# EAGLE board femto-beacon-esp32coin-PANEL (EAGLE 9.3.0), part 1 of 3
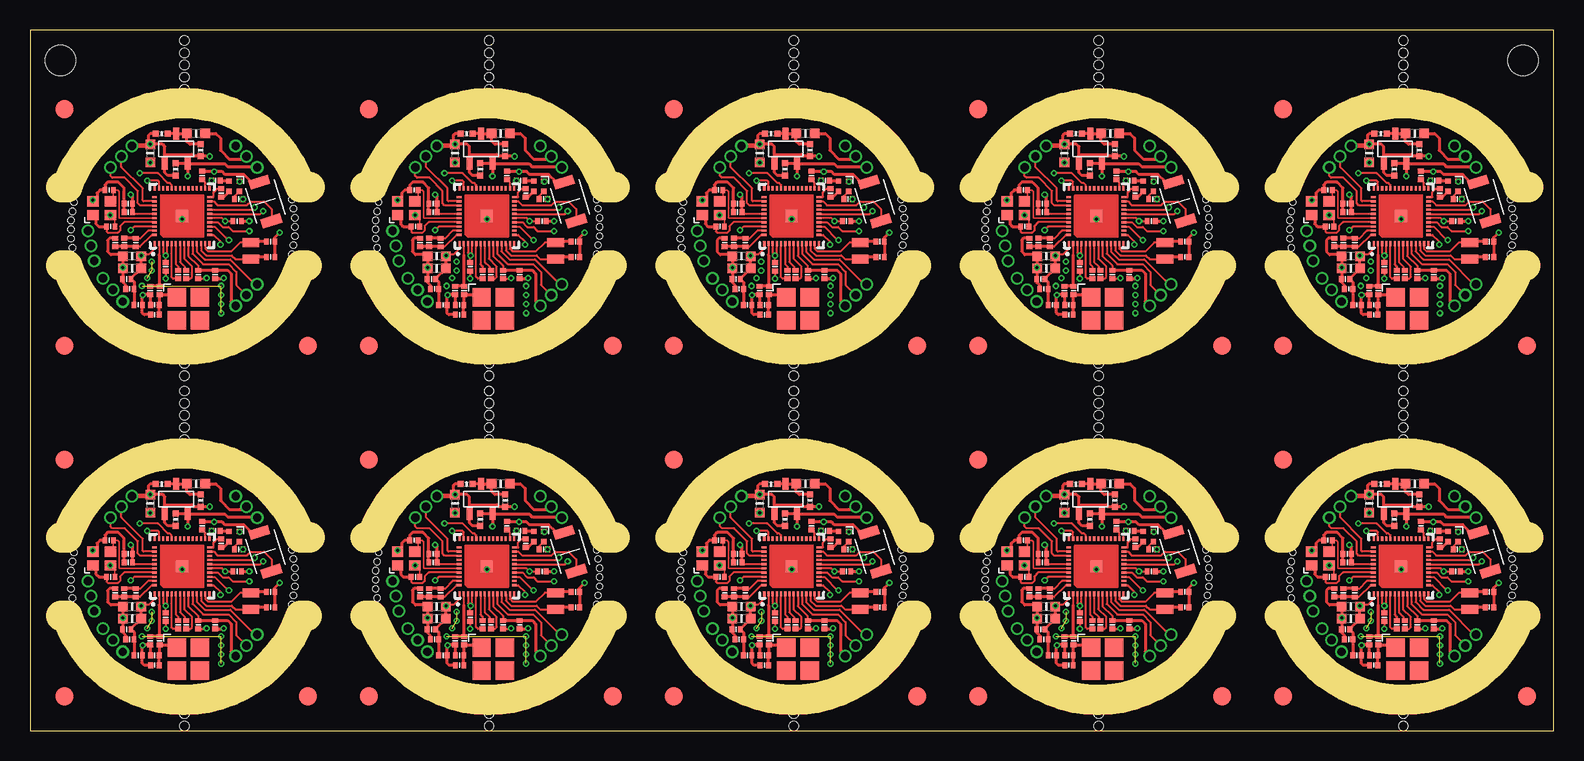
[diagram p0: board, top side]
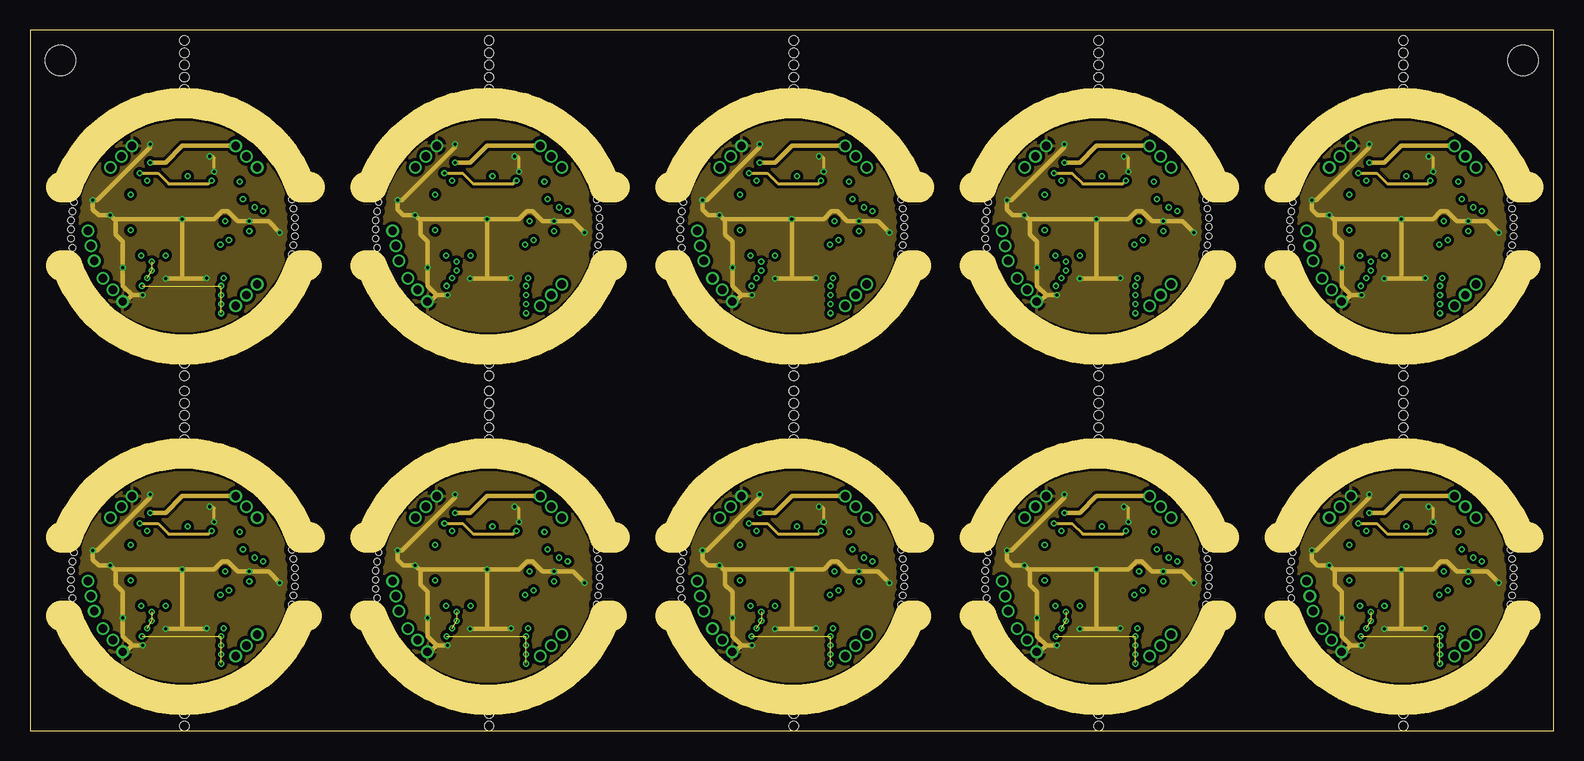
[diagram p1: board, inner layer Route2]
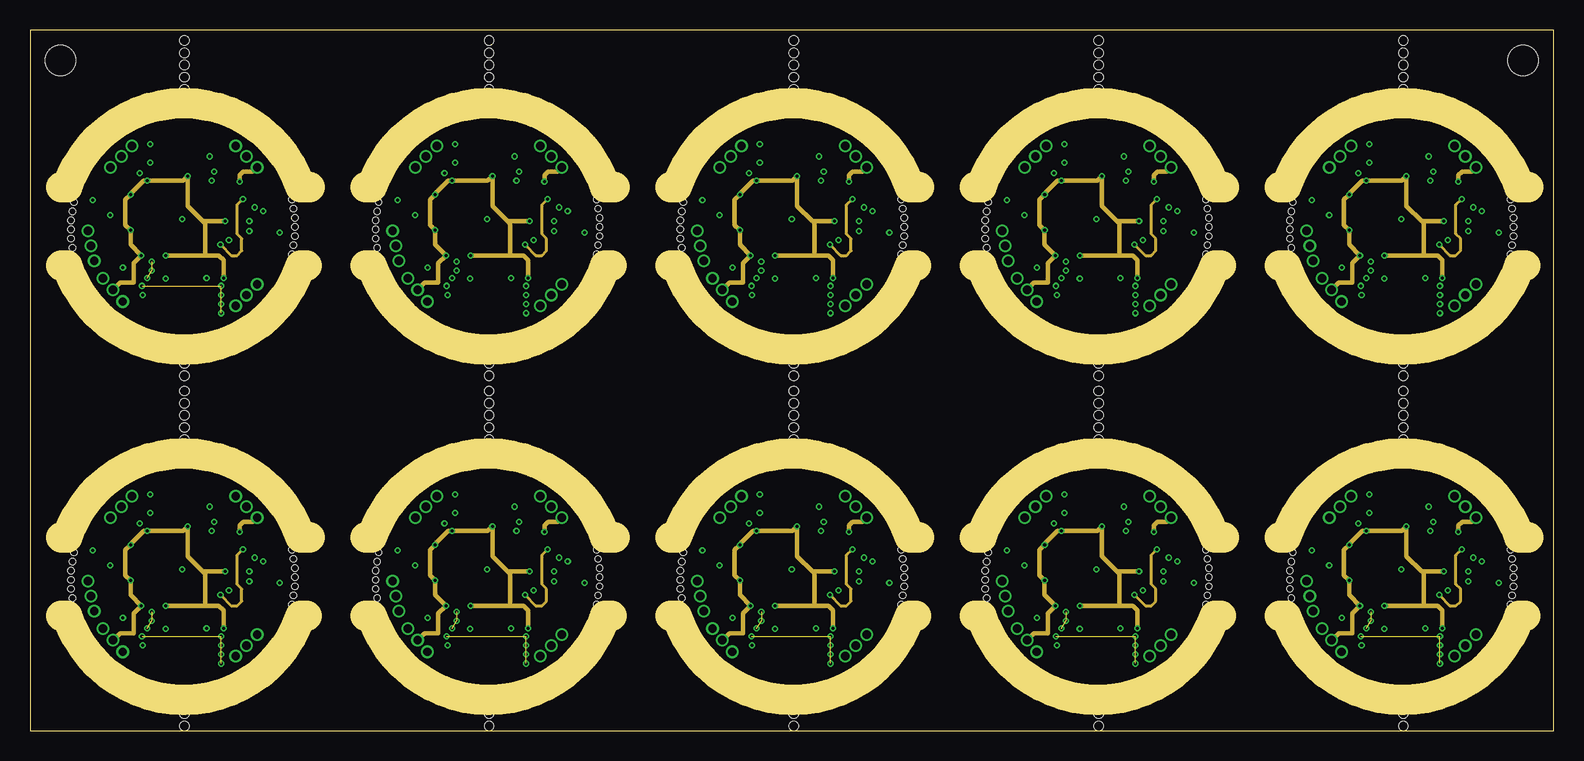
[diagram p2: board, inner layer Route15]
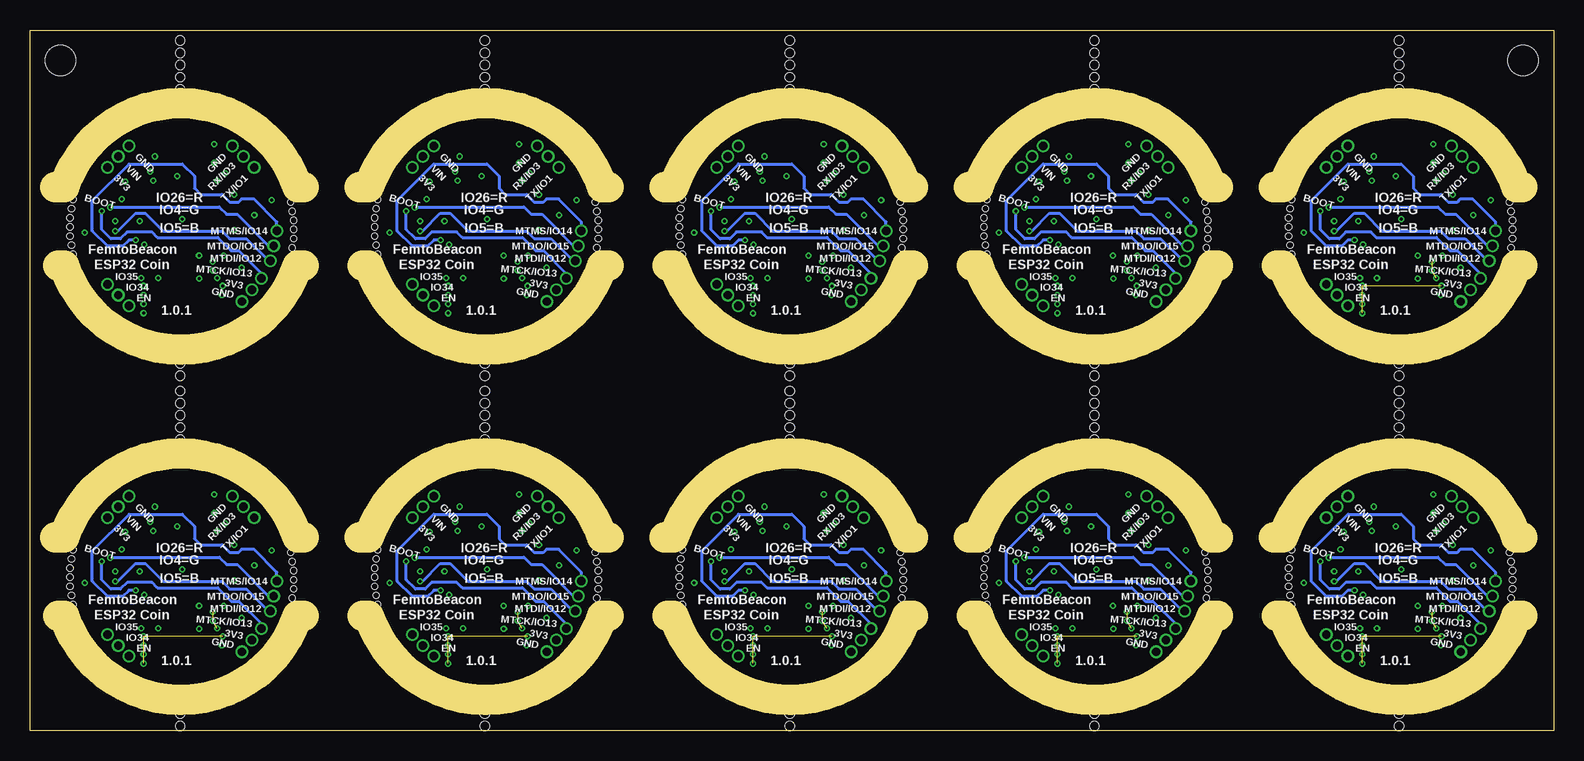
[diagram p3: board, bottom side, seen from below]

Size 127 x 58.42 mm. Coordinates in mm from the lower left corner, seen from the top.
Outline: 0,0 127,0 127,58.42 0,58.42 0,0
Copper layers (1*2*15*16): Top 0.035559375mm / dielectric 0.17018125mm / Route2 0.01778125mm / dielectric 47mil / Route15 0.01778125mm / dielectric 0.17018125mm / Bottom 0.035559375mm
Design rules "oshpark-4layer *": minimum track width 5mil, minimum drill 10mil, track to track 6mil, track to pad 6mil, pad to pad 6mil, via to via 6mil, smd to smd 5mil, copper to edge 15mil, drill to drill 6mil, minimum pad ring 4mil, minimum via ring 4mil, stop-mask expansion 2.5mil, vias tented up to drill 10mil, thermal gap 10mil
Holes 0.51 mm at 22.08,12.79 21.82,15.08 22.08,13.55 22.08,12.03 21.95,14.32 21.82,10.51 21.95,11.27 3.41,12.57 3.67,10.29 3.41,11.81 3.41,13.34 3.54,11.05 3.67,14.86 3.54,14.1 22.08,42 21.82,44.29 22.08,42.77 22.08,41.24 21.95,43.53 21.82,39.72 21.95,40.48 3.41,41.78 3.67,39.5 3.41,41.02 3.41,42.55 3.54,40.26 3.67,44.07 3.54,43.31 47.48,12.79 47.22,15.08 47.48,13.55 47.48,12.03 47.35,14.32 47.22,10.51 47.35,11.27 28.81,12.57 29.07,10.29 28.81,11.81 28.81,13.34 28.94,11.05 29.07,14.86 28.94,14.1 47.48,42 47.22,44.29 47.48,42.77 47.48,41.24 47.35,43.53 47.22,39.72 47.35,40.48 28.81,41.78 29.07,39.5 28.81,41.02 28.81,42.55 28.94,40.26 29.07,44.07 28.94,43.31 72.88,12.79 72.62,15.08 72.88,13.55 72.88,12.03 72.75,14.32 72.62,10.51 72.75,11.27 54.21,12.57 54.47,10.29 54.21,11.81 54.21,13.34 54.34,11.05 54.47,14.86 54.34,14.1 72.88,42 72.62,44.29 72.88,42.77 72.88,41.24 72.75,43.53 72.62,39.72 72.75,40.48 54.21,41.78 54.47,39.5 54.21,41.02 54.21,42.55 54.34,40.26 54.47,44.07 54.34,43.31 98.28,12.79 98.02,15.08 98.28,13.55 98.28,12.03 98.15,14.32 98.02,10.51 98.15,11.27 79.61,12.57 79.87,10.29 79.61,11.81 79.61,13.34 79.74,11.05 79.87,14.86 79.74,14.1 98.28,42 98.02,44.29 98.28,42.77 98.28,41.24 98.15,43.53 98.02,39.72 98.15,40.48 79.61,41.78 79.87,39.5 79.61,41.02 79.61,42.55 79.74,40.26 79.87,44.07 79.74,43.31 123.68,12.79 123.42,15.08 123.68,13.55 123.68,12.03 123.55,14.32 123.42,10.51 123.55,11.27 105.01,12.57 105.27,10.29 105.01,11.81 105.01,13.34 105.14,11.05 105.27,14.86 105.14,14.1 123.68,42 123.42,44.29 123.68,42.77 123.68,41.24 123.55,43.53 123.42,39.72 123.55,40.48 105.01,41.78 105.27,39.5 105.01,41.02 105.01,42.55 105.14,40.26 105.27,44.07 105.14,43.31
Holes 0.76 mm at 12.87,0.38 12.87,24.26 12.87,1.4 12.87,25.27 12.87,26.29 12.87,27.3 12.87,28.32 12.87,29.59 12.87,53.47 12.87,30.61 12.87,54.48 12.87,55.5 12.87,56.52 12.87,57.53 38.27,0.38 38.27,24.26 38.27,1.4 38.27,25.27 38.27,26.29 38.27,27.3 38.27,28.32 38.27,29.59 38.27,53.47 38.27,30.61 38.27,54.48 38.27,55.5 38.27,56.52 38.27,57.53 63.67,0.38 63.67,24.26 63.67,1.4 63.67,25.27 63.67,26.29 63.67,27.3 63.67,28.32 63.67,29.59 63.67,53.47 63.67,30.61 63.67,54.48 63.67,55.5 63.67,56.52 63.67,57.53 89.07,0.38 89.07,24.26 89.07,1.4 89.07,25.27 89.07,26.29 89.07,27.3 89.07,28.32 89.07,29.59 89.07,53.47 89.07,30.61 89.07,54.48 89.07,55.5 89.07,56.52 89.07,57.53 114.47,0.38 114.47,24.26 114.47,1.4 114.47,25.27 114.47,26.29 114.47,27.3 114.47,28.32 114.47,29.59 114.47,53.47 114.47,30.61 114.47,54.48 114.47,55.5 114.47,56.52 114.47,57.53
Holes 2.54 mm at 124.46,55.88 2.54,55.88
Milling: 80 lines

## Footprints (pad centres in the part's own frame; a part is rotated, then mirrored left to right if it is on the bottom)
0479480001 = smd 1.54 x 1.54: ANT -0.963,0.963; NC1 0.978,0.963; NC2 0.978,-0.978; NC3 -0.963,-0.978
SIDE_ACT_NO_GND_NO_BOSS = smd 0.8 x 1.7: 1 -1.7,0; 2 1.7,0
PART = smd 0.4 x 0.5: 1 -0.35,0; 2 0.35,0
_0402MP = smd 0.5 x 0.5: 1 -0.508,0; 2 0.508,0
_0603MP = smd 0.8 x 0.8: 1 -0.762,0; 2 0.762,0
FIDUCIAL_1MM = smd 1.5 x 1.5: 1 0,0
ESP32-QFN48_5X5 = smd 0.18 x 0.4: 1 -2.275,-2.3; 2 -1.925,-2.3; 3 -1.575,-2.3; 4 -1.225,-2.3; 5 -0.875,-2.3; 6 -0.525,-2.3; 7 -0.175,-2.3; 8 0.175,-2.3; 9 0.525,-2.3; 10 0.875,-2.3; 11 1.225,-2.3; 12 1.575,-2.3; 13 1.925,-2.3; 14 2.275,-2.3; 25 2.275,2.3; 26 1.925,2.3; 27 1.575,2.3; 28 1.225,2.3; 29 0.875,2.3; 30 0.525,2.3; 31 0.175,2.3; 32 -0.175,2.3; 33 -0.525,2.3; 34 -0.875,2.3; 35 -1.225,2.3; 36 -1.575,2.3; 37 -1.925,2.3; 38 -2.275,2.3 | smd 0.4 x 0.18: 15 2.3,-1.575; 16 2.3,-1.225; 17 2.3,-0.875; 18 2.3,-0.525; 19 2.3,-0.175; 20 2.3,0.175; 21 2.3,0.525; 22 2.3,0.875; 23 2.3,1.225; 24 2.3,1.575; 39 -2.3,1.575; 40 -2.3,1.225; 41 -2.3,0.875; 42 -2.3,0.525; 43 -2.3,0.175; 44 -2.3,-0.175; 45 -2.3,-0.525; 46 -2.3,-0.875; 47 -2.3,-1.225; 48 -2.3,-1.575 | smd 1 x 1: 49 0,0
MCP1700T-3302E/TT = smd 0.5 x 1: GND -0.95,-1.25; VIN 0,1.25; VOUT 0.95,-1.25
1X3_ROUND = drill 0.7 pad 1: P$1 0,0; P$2 0,-1.27; P$3 0,-2.54
LRTB_R48G = smd 0.45 x 0.45: 1 0.425,0.425; 2 0.425,-0.425; 3 -0.425,-0.425; 4 -0.425,0.425
FA-128 = smd 0.95 x 0.85: 1 -0.725,-0.575; 2 0.725,-0.575; 3 0.725,0.575; 4 -0.725,0.575
ABS06-107-32.768KHZ-T = smd 0.75 x 1.4: 1 -0.7,0; 2 0.7,0

## Placement (x,y rotation side)
ANT1  0479480001  [0479480001]  13.21,5.97 0 top
ANT2  0479480001  [0479480001]  13.21,35.18 0 top
ANT3  0479480001  [0479480001]  38.61,5.97 0 top
ANT4  0479480001  [0479480001]  38.61,35.18 0 top
ANT5  0479480001  [0479480001]  64.01,5.97 0 top
ANT6  0479480001  [0479480001]  64.01,35.18 0 top
ANT7  0479480001  [0479480001]  89.41,5.97 0 top
ANT8  0479480001  [0479480001]  89.41,35.18 0 top
ANT9  0479480001  [0479480001]  114.81,5.97 0 top
ANT10  0479480001  [0479480001]  114.81,35.18 0 top
BOOT1  TACTILE_SWITCH_NO_GND_NO_BOSS  [SIDE_ACT_NO_GND_NO_BOSS]  19.62,14.91 287.5 top
BOOT2  TACTILE_SWITCH_NO_GND_NO_BOSS  [SIDE_ACT_NO_GND_NO_BOSS]  19.62,44.12 287.5 top
BOOT3  TACTILE_SWITCH_NO_GND_NO_BOSS  [SIDE_ACT_NO_GND_NO_BOSS]  45.02,14.91 287.5 top
BOOT4  TACTILE_SWITCH_NO_GND_NO_BOSS  [SIDE_ACT_NO_GND_NO_BOSS]  45.02,44.12 287.5 top
BOOT5  TACTILE_SWITCH_NO_GND_NO_BOSS  [SIDE_ACT_NO_GND_NO_BOSS]  70.42,14.91 287.5 top
BOOT6  TACTILE_SWITCH_NO_GND_NO_BOSS  [SIDE_ACT_NO_GND_NO_BOSS]  70.42,44.12 287.5 top
BOOT7  TACTILE_SWITCH_NO_GND_NO_BOSS  [SIDE_ACT_NO_GND_NO_BOSS]  95.82,14.91 287.5 top
BOOT8  TACTILE_SWITCH_NO_GND_NO_BOSS  [SIDE_ACT_NO_GND_NO_BOSS]  95.82,44.12 287.5 top
BOOT9  TACTILE_SWITCH_NO_GND_NO_BOSS  [SIDE_ACT_NO_GND_NO_BOSS]  121.22,14.91 287.5 top
BOOT10  TACTILE_SWITCH_NO_GND_NO_BOSS  [SIDE_ACT_NO_GND_NO_BOSS]  121.22,44.12 287.5 top
C1  1uF  [PART]  8.06,8.45 0 top
C2  2.2uF  [_0402MP]  12.14,17.59 90 top
C3  2.2uF  [_0402MP]  10.99,20.55 0 top
C4  10pF  [PART]  6.73,12.83 180 top
C5  10pF  [PART]  6.6,15.88 0 top
C6  270pF  [PART]  12.34,8.83 90 top
C7  270pF  [PART]  13.02,8.83 270 top
C8  6.8pF  [PART]  10.79,7.49 90 top
C9  2.4pF  [PART]  10.41,6.29 0 top
C10  10uF  [_0603MP]  8.51,10.35 0 top
C11  10uF  [_0603MP]  8.51,9.33 0 top
C12  0.1uF  [PART]  8.32,7.62 0 top
C13  0.1uF  [PART]  9.02,6.29 180 top
C14  0.47uF  [_0402MP]  14.22,19.18 90 top
C15  1uF  [PART]  8.2,14.03 0 top
C16  100pF  [PART]  8.2,14.73 0 top
C17  0.1uF  [PART]  11.3,9.46 90 top
C18  1uF  [PART]  14.35,17.08 270 top
C19  0.1uF  [PART]  17.27,13.27 180 top
C20  10nF/6.3V(10%)  [PART]  7.11,11.49 270 top
C21  3.3nF/6.3V(10%)  [PART]  8.83,11.48 90 top
C22  0.1uF  [PART]  14.03,8.83 90 top
C23  4.1pF  [PART]  20.07,10.29 180 top
C24  4.1pF  [PART]  20.07,11.56 0 top
C25  270pF  [PART]  12.34,38.04 90 top
C26  1uF  [PART]  8.06,37.66 0 top
C27  2.2uF  [_0402MP]  12.14,46.8 90 top
C28  2.2uF  [_0402MP]  10.99,49.76 0 top
C29  10pF  [PART]  6.73,42.04 180 top
C30  10pF  [PART]  6.6,45.09 0 top
C31  270pF  [PART]  13.02,38.04 270 top
C32  6.8pF  [PART]  10.79,36.7 90 top
C33  2.4pF  [PART]  10.41,35.5 0 top
C34  10uF  [_0603MP]  8.51,39.56 0 top
C35  10uF  [_0603MP]  8.51,38.54 0 top
C36  0.1uF  [PART]  8.32,36.83 0 top
C37  0.1uF  [PART]  9.02,35.5 180 top
C38  0.47uF  [_0402MP]  14.22,48.39 90 top
C39  1uF  [PART]  8.2,43.24 0 top
C40  100pF  [PART]  8.2,43.94 0 top
C41  0.1uF  [PART]  11.3,38.67 90 top
C42  1uF  [PART]  14.35,46.29 270 top
C43  0.1uF  [PART]  17.27,42.48 180 top
C44  10nF/6.3V(10%)  [PART]  7.11,40.7 270 top
C45  3.3nF/6.3V(10%)  [PART]  8.83,40.69 90 top
C46  0.1uF  [PART]  14.03,38.04 90 top
C47  4.1pF  [PART]  20.07,39.5 180 top
C48  4.1pF  [PART]  20.07,40.77 0 top
C49  270pF  [PART]  37.74,8.83 90 top
C50  1uF  [PART]  33.46,8.45 0 top
C51  2.2uF  [_0402MP]  37.54,17.59 90 top
C52  2.2uF  [_0402MP]  36.39,20.55 0 top
C53  10pF  [PART]  32.13,12.83 180 top
C54  10pF  [PART]  32,15.88 0 top
C55  270pF  [PART]  38.42,8.83 270 top
C56  6.8pF  [PART]  36.2,7.49 90 top
C57  2.4pF  [PART]  35.81,6.29 0 top
C58  10uF  [_0603MP]  33.91,10.35 0 top
C59  10uF  [_0603MP]  33.91,9.33 0 top
C60  0.1uF  [PART]  33.72,7.62 0 top
C61  0.1uF  [PART]  34.42,6.29 180 top
C62  0.47uF  [_0402MP]  39.62,19.18 90 top
C63  1uF  [PART]  33.6,14.03 0 top
C64  100pF  [PART]  33.6,14.73 0 top
C65  0.1uF  [PART]  36.7,9.46 90 top
C66  1uF  [PART]  39.75,17.08 270 top
C67  0.1uF  [PART]  42.67,13.27 180 top
C68  10nF/6.3V(10%)  [PART]  32.51,11.49 270 top
C69  3.3nF/6.3V(10%)  [PART]  34.23,11.48 90 top
C70  0.1uF  [PART]  39.43,8.83 90 top
C71  4.1pF  [PART]  45.47,10.29 180 top
C72  4.1pF  [PART]  45.47,11.56 0 top
C73  270pF  [PART]  37.74,38.04 90 top
C74  1uF  [PART]  33.46,37.66 0 top
C75  2.2uF  [_0402MP]  37.54,46.8 90 top
C76  2.2uF  [_0402MP]  36.39,49.76 0 top
C77  10pF  [PART]  32.13,42.04 180 top
C78  10pF  [PART]  32,45.09 0 top
C79  270pF  [PART]  38.42,38.04 270 top
C80  6.8pF  [PART]  36.2,36.7 90 top
C81  2.4pF  [PART]  35.81,35.5 0 top
C82  10uF  [_0603MP]  33.91,39.56 0 top
C83  10uF  [_0603MP]  33.91,38.54 0 top
C84  0.1uF  [PART]  33.72,36.83 0 top
C85  0.1uF  [PART]  34.42,35.5 180 top
C86  0.47uF  [_0402MP]  39.62,48.39 90 top
C87  1uF  [PART]  33.6,43.24 0 top
C88  100pF  [PART]  33.6,43.94 0 top
C89  0.1uF  [PART]  36.7,38.67 90 top
C90  1uF  [PART]  39.75,46.29 270 top
C91  0.1uF  [PART]  42.67,42.48 180 top
C92  10nF/6.3V(10%)  [PART]  32.51,40.7 270 top
C93  3.3nF/6.3V(10%)  [PART]  34.23,40.69 90 top
C94  0.1uF  [PART]  39.43,38.04 90 top
C95  4.1pF  [PART]  45.47,39.5 180 top
C96  4.1pF  [PART]  45.47,40.77 0 top
C97  270pF  [PART]  63.14,8.83 90 top
C98  1uF  [PART]  58.86,8.45 0 top
C99  2.2uF  [_0402MP]  62.94,17.59 90 top
C100  2.2uF  [_0402MP]  61.79,20.55 0 top
C101  10pF  [PART]  57.53,12.83 180 top
C102  10pF  [PART]  57.4,15.88 0 top
C103  270pF  [PART]  63.82,8.83 270 top
C104  6.8pF  [PART]  61.59,7.49 90 top
C105  2.4pF  [PART]  61.21,6.29 0 top
C106  10uF  [_0603MP]  59.31,10.35 0 top
C107  10uF  [_0603MP]  59.31,9.33 0 top
C108  0.1uF  [PART]  59.12,7.62 0 top
C109  0.1uF  [PART]  59.82,6.29 180 top
C110  0.47uF  [_0402MP]  65.02,19.18 90 top
C111  1uF  [PART]  59,14.03 0 top
C112  100pF  [PART]  59,14.73 0 top
C113  0.1uF  [PART]  62.1,9.46 90 top
C114  1uF  [PART]  65.15,17.08 270 top
C115  0.1uF  [PART]  68.07,13.27 180 top
C116  10nF/6.3V(10%)  [PART]  57.91,11.49 270 top
C117  3.3nF/6.3V(10%)  [PART]  59.63,11.48 90 top
C118  0.1uF  [PART]  64.83,8.83 90 top
C119  4.1pF  [PART]  70.87,10.29 180 top
C120  4.1pF  [PART]  70.87,11.56 0 top
C121  270pF  [PART]  63.14,38.04 90 top
C122  1uF  [PART]  58.86,37.66 0 top
C123  2.2uF  [_0402MP]  62.94,46.8 90 top
C124  2.2uF  [_0402MP]  61.79,49.76 0 top
C125  10pF  [PART]  57.53,42.04 180 top
C126  10pF  [PART]  57.4,45.09 0 top
C127  270pF  [PART]  63.82,38.04 270 top
C128  6.8pF  [PART]  61.59,36.7 90 top
C129  2.4pF  [PART]  61.21,35.5 0 top
C130  10uF  [_0603MP]  59.31,39.56 0 top
C131  10uF  [_0603MP]  59.31,38.54 0 top
C132  0.1uF  [PART]  59.12,36.83 0 top
C133  0.1uF  [PART]  59.82,35.5 180 top
C134  0.47uF  [_0402MP]  65.02,48.39 90 top
C135  1uF  [PART]  59,43.24 0 top
C136  100pF  [PART]  59,43.94 0 top
C137  0.1uF  [PART]  62.1,38.67 90 top
C138  1uF  [PART]  65.15,46.29 270 top
C139  0.1uF  [PART]  68.07,42.48 180 top
C140  10nF/6.3V(10%)  [PART]  57.91,40.7 270 top
C141  3.3nF/6.3V(10%)  [PART]  59.63,40.69 90 top
C142  0.1uF  [PART]  64.83,38.04 90 top
C143  4.1pF  [PART]  70.87,39.5 180 top
C144  4.1pF  [PART]  70.87,40.77 0 top
C145  270pF  [PART]  88.54,8.83 90 top
C146  1uF  [PART]  84.26,8.45 0 top
C147  2.2uF  [_0402MP]  88.34,17.59 90 top
C148  2.2uF  [_0402MP]  87.19,20.55 0 top
C149  10pF  [PART]  82.93,12.83 180 top
C150  10pF  [PART]  82.8,15.88 0 top
C151  270pF  [PART]  89.22,8.83 270 top
C152  6.8pF  [PART]  87,7.49 90 top
C153  2.4pF  [PART]  86.61,6.29 0 top
C154  10uF  [_0603MP]  84.71,10.35 0 top
C155  10uF  [_0603MP]  84.71,9.33 0 top
C156  0.1uF  [PART]  84.52,7.62 0 top
C157  0.1uF  [PART]  85.22,6.29 180 top
C158  0.47uF  [_0402MP]  90.42,19.18 90 top
C159  1uF  [PART]  84.4,14.03 0 top
C160  100pF  [PART]  84.4,14.73 0 top
C161  0.1uF  [PART]  87.5,9.46 90 top
C162  1uF  [PART]  90.55,17.08 270 top
C163  0.1uF  [PART]  93.47,13.27 180 top
C164  10nF/6.3V(10%)  [PART]  83.31,11.49 270 top
C165  3.3nF/6.3V(10%)  [PART]  85.03,11.48 90 top
C166  0.1uF  [PART]  90.23,8.83 90 top
C167  4.1pF  [PART]  96.27,10.29 180 top
C168  4.1pF  [PART]  96.27,11.56 0 top
C169  270pF  [PART]  88.54,38.04 90 top
C170  1uF  [PART]  84.26,37.66 0 top
C171  2.2uF  [_0402MP]  88.34,46.8 90 top
C172  2.2uF  [_0402MP]  87.19,49.76 0 top
C173  10pF  [PART]  82.93,42.04 180 top
C174  10pF  [PART]  82.8,45.09 0 top
C175  270pF  [PART]  89.22,38.04 270 top
C176  6.8pF  [PART]  87,36.7 90 top
C177  2.4pF  [PART]  86.61,35.5 0 top
C178  10uF  [_0603MP]  84.71,39.56 0 top
C179  10uF  [_0603MP]  84.71,38.54 0 top
C180  0.1uF  [PART]  84.52,36.83 0 top
C181  0.1uF  [PART]  85.22,35.5 180 top
C182  0.47uF  [_0402MP]  90.42,48.39 90 top
C183  1uF  [PART]  84.4,43.24 0 top
C184  100pF  [PART]  84.4,43.94 0 top
C185  0.1uF  [PART]  87.5,38.67 90 top
C186  1uF  [PART]  90.55,46.29 270 top
C187  0.1uF  [PART]  93.47,42.48 180 top
C188  10nF/6.3V(10%)  [PART]  83.31,40.7 270 top
C189  3.3nF/6.3V(10%)  [PART]  85.03,40.69 90 top
C190  0.1uF  [PART]  90.23,38.04 90 top
C191  4.1pF  [PART]  96.27,39.5 180 top
C192  4.1pF  [PART]  96.27,40.77 0 top
C193  270pF  [PART]  113.94,8.83 90 top
C194  1uF  [PART]  109.66,8.45 0 top
C195  2.2uF  [_0402MP]  113.74,17.59 90 top
C196  2.2uF  [_0402MP]  112.59,20.55 0 top
C197  10pF  [PART]  108.33,12.83 180 top
C198  10pF  [PART]  108.2,15.88 0 top
C199  270pF  [PART]  114.62,8.83 270 top
C200  6.8pF  [PART]  112.39,7.49 90 top
C201  2.4pF  [PART]  112.01,6.29 0 top
C202  10uF  [_0603MP]  110.11,10.35 0 top
C203  10uF  [_0603MP]  110.11,9.33 0 top
C204  0.1uF  [PART]  109.92,7.62 0 top
C205  0.1uF  [PART]  110.62,6.29 180 top
C206  0.47uF  [_0402MP]  115.82,19.18 90 top
C207  1uF  [PART]  109.8,14.03 0 top
C208  100pF  [PART]  109.8,14.73 0 top
C209  0.1uF  [PART]  112.9,9.46 90 top
C210  1uF  [PART]  115.95,17.08 270 top
C211  0.1uF  [PART]  118.87,13.27 180 top
C212  10nF/6.3V(10%)  [PART]  108.71,11.49 270 top
C213  3.3nF/6.3V(10%)  [PART]  110.43,11.48 90 top
C214  0.1uF  [PART]  115.63,8.83 90 top
C215  4.1pF  [PART]  121.67,10.29 180 top
C216  4.1pF  [PART]  121.67,11.56 0 top
C217  270pF  [PART]  113.94,38.04 90 top
C218  1uF  [PART]  109.66,37.66 0 top
C219  2.2uF  [_0402MP]  113.74,46.8 90 top
C220  2.2uF  [_0402MP]  112.59,49.76 0 top
C221  10pF  [PART]  108.33,42.04 180 top
C222  10pF  [PART]  108.2,45.09 0 top
C223  270pF  [PART]  114.62,38.04 270 top
C224  6.8pF  [PART]  112.39,36.7 90 top
C225  2.4pF  [PART]  112.01,35.5 0 top
C226  10uF  [_0603MP]  110.11,39.56 0 top
C227  10uF  [_0603MP]  110.11,38.54 0 top
C228  0.1uF  [PART]  109.92,36.83 0 top
C229  0.1uF  [PART]  110.62,35.5 180 top
C230  0.47uF  [_0402MP]  115.82,48.39 90 top
C231  1uF  [PART]  109.8,43.24 0 top
C232  100pF  [PART]  109.8,43.94 0 top
C233  0.1uF  [PART]  112.9,38.67 90 top
C234  1uF  [PART]  115.95,46.29 270 top
C235  0.1uF  [PART]  118.87,42.48 180 top
C236  10nF/6.3V(10%)  [PART]  108.71,40.7 270 top
C237  3.3nF/6.3V(10%)  [PART]  110.43,40.69 90 top
C238  0.1uF  [PART]  115.63,38.04 90 top
C239  4.1pF  [PART]  121.67,39.5 180 top
C240  4.1pF  [PART]  121.67,40.77 0 top
FB1  FERRITE  [_0603MP]  10.03,18.92 90 top
FB2  FERRITE  [_0603MP]  13.84,20.57 0 top
FB3  FERRITE  [_0603MP]  10.03,48.13 90 top
FB4  FERRITE  [_0603MP]  13.84,49.78 0 top
FB5  FERRITE  [_0603MP]  35.43,18.92 90 top
FB6  FERRITE  [_0603MP]  39.24,20.57 0 top
FB7  FERRITE  [_0603MP]  35.43,48.13 90 top
FB8  FERRITE  [_0603MP]  39.24,49.78 0 top
FB9  FERRITE  [_0603MP]  60.83,18.92 90 top
FB10  FERRITE  [_0603MP]  64.64,20.57 0 top
FB11  FERRITE  [_0603MP]  60.83,48.13 90 top
FB12  FERRITE  [_0603MP]  64.64,49.78 0 top
FB13  FERRITE  [_0603MP]  86.23,18.92 90 top
FB14  FERRITE  [_0603MP]  90.04,20.57 0 top
FB15  FERRITE  [_0603MP]  86.23,48.13 90 top
FB16  FERRITE  [_0603MP]  90.04,49.78 0 top
FB17  FERRITE  [_0603MP]  111.63,18.92 90 top
FB18  FERRITE  [_0603MP]  115.44,20.57 0 top
FB19  FERRITE  [_0603MP]  111.63,48.13 90 top
FB20  FERRITE  [_0603MP]  115.44,49.78 0 top
FID1  FIDUCIAL  [FIDUCIAL_1MM]  2.86,2.86 0 top
FID2  FIDUCIAL  [FIDUCIAL_1MM]  2.86,22.61 0 top
FID3  FIDUCIAL  [FIDUCIAL_1MM]  23.18,2.86 0 top
FID4  FIDUCIAL  [FIDUCIAL_1MM]  2.86,32.07 0 top
FID5  FIDUCIAL  [FIDUCIAL_1MM]  2.86,51.82 0 top
FID6  FIDUCIAL  [FIDUCIAL_1MM]  23.18,32.07 0 top
FID7  FIDUCIAL  [FIDUCIAL_1MM]  28.26,2.86 0 top
FID8  FIDUCIAL  [FIDUCIAL_1MM]  28.26,22.61 0 top
FID9  FIDUCIAL  [FIDUCIAL_1MM]  48.58,2.86 0 top
FID10  FIDUCIAL  [FIDUCIAL_1MM]  28.26,32.07 0 top
FID11  FIDUCIAL  [FIDUCIAL_1MM]  28.26,51.82 0 top
FID12  FIDUCIAL  [FIDUCIAL_1MM]  48.58,32.07 0 top
FID13  FIDUCIAL  [FIDUCIAL_1MM]  53.66,2.86 0 top
FID14  FIDUCIAL  [FIDUCIAL_1MM]  53.66,22.61 0 top
FID15  FIDUCIAL  [FIDUCIAL_1MM]  73.98,2.86 0 top
FID16  FIDUCIAL  [FIDUCIAL_1MM]  53.66,32.07 0 top
FID17  FIDUCIAL  [FIDUCIAL_1MM]  53.66,51.82 0 top
FID18  FIDUCIAL  [FIDUCIAL_1MM]  73.98,32.07 0 top
FID19  FIDUCIAL  [FIDUCIAL_1MM]  79.06,2.86 0 top
FID20  FIDUCIAL  [FIDUCIAL_1MM]  79.06,22.61 0 top
FID21  FIDUCIAL  [FIDUCIAL_1MM]  99.38,2.86 0 top
FID22  FIDUCIAL  [FIDUCIAL_1MM]  79.06,32.07 0 top
FID23  FIDUCIAL  [FIDUCIAL_1MM]  79.06,51.82 0 top
FID24  FIDUCIAL  [FIDUCIAL_1MM]  99.38,32.07 0 top
FID25  FIDUCIAL  [FIDUCIAL_1MM]  104.46,2.86 0 top
FID26  FIDUCIAL  [FIDUCIAL_1MM]  104.46,22.61 0 top
FID27  FIDUCIAL  [FIDUCIAL_1MM]  124.78,2.86 0 top
FID28  FIDUCIAL  [FIDUCIAL_1MM]  104.46,32.07 0 top
FID29  FIDUCIAL  [FIDUCIAL_1MM]  104.46,51.82 0 top
FID30  FIDUCIAL  [FIDUCIAL_1MM]  124.78,32.07 0 top
IC1  ESP32-QFN_5X5  [ESP32-QFN48_5X5]  12.68,13.7 0 top
IC2  ESP32-QFN_5X5  [ESP32-QFN48_5X5]  12.68,42.91 0 top
IC3  ESP32-QFN_5X5  [ESP32-QFN48_5X5]  38.08,13.7 0 top
IC4  ESP32-QFN_5X5  [ESP32-QFN48_5X5]  38.08,42.91 0 top
IC5  ESP32-QFN_5X5  [ESP32-QFN48_5X5]  63.48,13.7 0 top
IC6  ESP32-QFN_5X5  [ESP32-QFN48_5X5]  63.48,42.91 0 top
IC7  ESP32-QFN_5X5  [ESP32-QFN48_5X5]  88.88,13.7 0 top
IC8  ESP32-QFN_5X5  [ESP32-QFN48_5X5]  88.88,42.91 0 top
IC9  ESP32-QFN_5X5  [ESP32-QFN48_5X5]  114.28,13.7 0 top
IC10  ESP32-QFN_5X5  [ESP32-QFN48_5X5]  114.28,42.91 0 top
L1  1.6nH  [PART]  10.03,36.7 90 top
L2  1.6nH  [PART]  10.03,7.49 90 top
L3  1.6nH  [PART]  35.43,7.49 90 top
L4  1.6nH  [PART]  35.43,36.7 90 top
L5  1.6nH  [PART]  60.83,7.49 90 top
L6  1.6nH  [PART]  60.83,36.7 90 top
L7  1.6nH  [PART]  86.23,7.49 90 top
L8  1.6nH  [PART]  86.23,36.7 90 top
L9  1.6nH  [PART]  111.63,7.49 90 top
L10  1.6nH  [PART]  111.63,36.7 90 top
LDO1  MCP1700T-3302E/TT  [MCP1700T-3302E/TT]  12.19,19.3 0 top
LDO2  MCP1700T-3302E/TT  [MCP1700T-3302E/TT]  12.19,48.51 0 top
LDO3  MCP1700T-3302E/TT  [MCP1700T-3302E/TT]  37.59,19.3 0 top
LDO4  MCP1700T-3302E/TT  [MCP1700T-3302E/TT]  37.59,48.51 0 top
LDO5  MCP1700T-3302E/TT  [MCP1700T-3302E/TT]  62.99,19.3 0 top
LDO6  MCP1700T-3302E/TT  [MCP1700T-3302E/TT]  62.99,48.51 0 top
LDO7  MCP1700T-3302E/TT  [MCP1700T-3302E/TT]  88.39,19.3 0 top
LDO8  MCP1700T-3302E/TT  [MCP1700T-3302E/TT]  88.39,48.51 0 top
LDO9  MCP1700T-3302E/TT  [MCP1700T-3302E/TT]  113.79,19.3 0 top
LDO10  MCP1700T-3302E/TT  [MCP1700T-3302E/TT]  113.79,48.51 0 top
PIN_EN  1X3_ROUND  [1X3_ROUND]  18.94,8 315 top
PIN_EN1  1X3_ROUND  [1X3_ROUND]  18.94,37.21 315 top
PIN_EN2  1X3_ROUND  [1X3_ROUND]  44.34,8 315 top
PIN_EN3  1X3_ROUND  [1X3_ROUND]  44.34,37.21 315 top
PIN_EN4  1X3_ROUND  [1X3_ROUND]  69.74,8 315 top
PIN_EN5  1X3_ROUND  [1X3_ROUND]  69.74,37.21 315 top
PIN_EN6  1X3_ROUND  [1X3_ROUND]  95.14,8 315 top
PIN_EN7  1X3_ROUND  [1X3_ROUND]  95.14,37.21 315 top
PIN_EN8  1X3_ROUND  [1X3_ROUND]  120.54,8 315 top
PIN_EN9  1X3_ROUND  [1X3_ROUND]  120.54,37.21 315 top
PIN_GPIO_A  1X3_ROUND  [1X3_ROUND]  6.1,8.51 40 top
PIN_GPIO_A1  1X3_ROUND  [1X3_ROUND]  6.1,37.72 40 top
PIN_GPIO_A2  1X3_ROUND  [1X3_ROUND]  31.5,8.51 40 top
PIN_GPIO_A3  1X3_ROUND  [1X3_ROUND]  31.5,37.72 40 top
PIN_GPIO_A4  1X3_ROUND  [1X3_ROUND]  56.9,8.51 40 top
PIN_GPIO_A5  1X3_ROUND  [1X3_ROUND]  56.9,37.72 40 top
PIN_GPIO_A6  1X3_ROUND  [1X3_ROUND]  82.3,8.51 40 top
PIN_GPIO_A7  1X3_ROUND  [1X3_ROUND]  82.3,37.72 40 top
PIN_GPIO_A8  1X3_ROUND  [1X3_ROUND]  107.7,8.51 40 top
PIN_GPIO_A9  1X3_ROUND  [1X3_ROUND]  107.7,37.72 40 top
PIN_GPIO_B  1X3_ROUND  [1X3_ROUND]  4.83,12.45 12 top
PIN_GPIO_B1  1X3_ROUND  [1X3_ROUND]  4.83,41.66 12 top
PIN_GPIO_B2  1X3_ROUND  [1X3_ROUND]  30.23,12.45 12 top
PIN_GPIO_B3  1X3_ROUND  [1X3_ROUND]  30.23,41.66 12 top
PIN_GPIO_B4  1X3_ROUND  [1X3_ROUND]  55.63,12.45 12 top
PIN_GPIO_B5  1X3_ROUND  [1X3_ROUND]  55.63,41.66 12 top
PIN_GPIO_B6  1X3_ROUND  [1X3_ROUND]  81.03,12.45 12 top
PIN_GPIO_B7  1X3_ROUND  [1X3_ROUND]  81.03,41.66 12 top
PIN_GPIO_B8  1X3_ROUND  [1X3_ROUND]  106.43,12.45 12 top
PIN_GPIO_B9  1X3_ROUND  [1X3_ROUND]  106.43,41.66 12 top
PIN_PWR  1X3_ROUND  [1X3_ROUND]  17.14,19.56 45 top
PIN_PWR1  1X3_ROUND  [1X3_ROUND]  17.14,48.77 45 top
PIN_PWR2  1X3_ROUND  [1X3_ROUND]  42.55,19.56 45 top
PIN_PWR3  1X3_ROUND  [1X3_ROUND]  42.55,48.77 45 top
PIN_PWR4  1X3_ROUND  [1X3_ROUND]  67.94,19.56 45 top
PIN_PWR5  1X3_ROUND  [1X3_ROUND]  67.94,48.77 45 top
PIN_PWR6  1X3_ROUND  [1X3_ROUND]  93.34,19.56 45 top
PIN_PWR7  1X3_ROUND  [1X3_ROUND]  93.34,48.77 45 top
PIN_PWR8  1X3_ROUND  [1X3_ROUND]  118.75,19.56 45 top
PIN_PWR9  1X3_ROUND  [1X3_ROUND]  118.75,48.77 45 top
PIN_UART  1X3_ROUND  [1X3_ROUND]  8.51,19.56 315 top
PIN_UART1  1X3_ROUND  [1X3_ROUND]  8.51,48.77 315 top
PIN_UART2  1X3_ROUND  [1X3_ROUND]  33.91,19.56 315 top
PIN_UART3  1X3_ROUND  [1X3_ROUND]  33.91,48.77 315 top
PIN_UART4  1X3_ROUND  [1X3_ROUND]  59.31,19.56 315 top
PIN_UART5  1X3_ROUND  [1X3_ROUND]  59.31,48.77 315 top
PIN_UART6  1X3_ROUND  [1X3_ROUND]  84.71,19.56 315 top
PIN_UART7  1X3_ROUND  [1X3_ROUND]  84.71,48.77 315 top
PIN_UART8  1X3_ROUND  [1X3_ROUND]  110.11,19.56 315 top
PIN_UART9  1X3_ROUND  [1X3_ROUND]  110.11,48.77 315 top
R1  20K(5%)  [PART]  7.87,11.49 270 top
R2  10K  [PART]  15.43,8.83 90 top
R3  270  [PART]  15.49,16.64 180 top
R4  270  [PART]  15.93,15.62 90 top
R5  270  [PART]  17.4,15.11 0 top
R6  DNP  [PART]  10.41,5.46 0 top
R7  20K(5%)  [PART]  7.87,40.7 270 top
R8  10K  [PART]  15.43,38.04 90 top
R9  270  [PART]  15.49,45.85 180 top
R10  270  [PART]  15.93,44.83 90 top
R11  270  [PART]  17.4,44.32 0 top
R12  DNP  [PART]  10.41,34.67 0 top
R13  20K(5%)  [PART]  33.27,11.49 270 top
R14  10K  [PART]  40.83,8.83 90 top
R15  270  [PART]  40.89,16.64 180 top
R16  270  [PART]  41.33,15.62 90 top
R17  270  [PART]  42.8,15.11 0 top
R18  DNP  [PART]  35.81,5.46 0 top
R19  20K(5%)  [PART]  33.27,40.7 270 top
R20  10K  [PART]  40.83,38.04 90 top
R21  270  [PART]  40.89,45.85 180 top
R22  270  [PART]  41.33,44.83 90 top
R23  270  [PART]  42.8,44.32 0 top
R24  DNP  [PART]  35.81,34.67 0 top
R25  20K(5%)  [PART]  58.67,11.49 270 top
R26  10K  [PART]  66.23,8.83 90 top
R27  270  [PART]  66.29,16.64 180 top
R28  270  [PART]  66.73,15.62 90 top
R29  270  [PART]  68.2,15.11 0 top
R30  DNP  [PART]  61.21,5.46 0 top
R31  20K(5%)  [PART]  58.67,40.7 270 top
R32  10K  [PART]  66.23,38.04 90 top
R33  270  [PART]  66.29,45.85 180 top
R34  270  [PART]  66.73,44.83 90 top
R35  270  [PART]  68.2,44.32 0 top
R36  DNP  [PART]  61.21,34.67 0 top
R37  20K(5%)  [PART]  84.07,11.49 270 top
R38  10K  [PART]  91.63,8.83 90 top
R39  270  [PART]  91.69,16.64 180 top
R40  270  [PART]  92.13,15.62 90 top
R41  270  [PART]  93.6,15.11 0 top
R42  DNP  [PART]  86.61,5.46 0 top
R43  20K(5%)  [PART]  84.07,40.7 270 top
R44  10K  [PART]  91.63,38.04 90 top
R45  270  [PART]  91.69,45.85 180 top
R46  270  [PART]  92.13,44.83 90 top
R47  270  [PART]  93.6,44.32 0 top
R48  DNP  [PART]  86.61,34.67 0 top
R49  20K(5%)  [PART]  109.47,11.49 270 top
R50  10K  [PART]  117.03,8.83 90 top
R51  270  [PART]  117.09,16.64 180 top
R52  270  [PART]  117.53,15.62 90 top
R53  270  [PART]  119,15.11 0 top
R54  DNP  [PART]  112.01,5.46 0 top
R55  20K(5%)  [PART]  109.47,40.7 270 top
R56  10K  [PART]  117.03,38.04 90 top
R57  270  [PART]  117.09,45.85 180 top
R58  270  [PART]  117.53,44.83 90 top
R59  270  [PART]  119,44.32 0 top
R60  DNP  [PART]  112.01,34.67 0 top
RGB1  LRTB_R48G  [LRTB_R48G]  17.02,16.18 0 top
RGB2  LRTB_R48G  [LRTB_R48G]  17.02,45.39 0 top
RGB3  LRTB_R48G  [LRTB_R48G]  42.42,16.18 0 top
RGB4  LRTB_R48G  [LRTB_R48G]  42.42,45.39 0 top
RGB5  LRTB_R48G  [LRTB_R48G]  67.82,16.18 0 top
RGB6  LRTB_R48G  [LRTB_R48G]  67.82,45.39 0 top
RGB7  LRTB_R48G  [LRTB_R48G]  93.22,16.18 0 top
RGB8  LRTB_R48G  [LRTB_R48G]  93.22,45.39 0 top
RGB9  LRTB_R48G  [LRTB_R48G]  118.62,16.18 0 top
RGB10  LRTB_R48G  [LRTB_R48G]  118.62,45.39 0 top
XTAL1  40MHz  [FA-128]  5.97,14.35 0 top
XTAL2  ABS06-107-32.768KHZ-T  [ABS06-107-32.768KHZ-T]  18.41,10.79 90 top
XTAL3  40MHz  [FA-128]  5.97,43.56 0 top
XTAL4  ABS06-107-32.768KHZ-T  [ABS06-107-32.768KHZ-T]  18.41,40.01 90 top
XTAL5  40MHz  [FA-128]  31.37,14.35 0 top
XTAL6  ABS06-107-32.768KHZ-T  [ABS06-107-32.768KHZ-T]  43.81,10.79 90 top
XTAL7  40MHz  [FA-128]  31.37,43.56 0 top
XTAL8  ABS06-107-32.768KHZ-T  [ABS06-107-32.768KHZ-T]  43.81,40.01 90 top
XTAL9  40MHz  [FA-128]  56.77,14.35 0 top
XTAL10  ABS06-107-32.768KHZ-T  [ABS06-107-32.768KHZ-T]  69.22,10.79 90 top
XTAL11  40MHz  [FA-128]  56.77,43.56 0 top
XTAL12  ABS06-107-32.768KHZ-T  [ABS06-107-32.768KHZ-T]  69.22,40.01 90 top
XTAL13  40MHz  [FA-128]  82.17,14.35 0 top
XTAL14  ABS06-107-32.768KHZ-T  [ABS06-107-32.768KHZ-T]  94.61,10.79 90 top
XTAL15  40MHz  [FA-128]  82.17,43.56 0 top
XTAL16  ABS06-107-32.768KHZ-T  [ABS06-107-32.768KHZ-T]  94.61,40.01 90 top
XTAL17  40MHz  [FA-128]  107.57,14.35 0 top
XTAL18  ABS06-107-32.768KHZ-T  [ABS06-107-32.768KHZ-T]  120.02,10.79 90 top
XTAL19  40MHz  [FA-128]  107.57,43.56 0 top
XTAL20  ABS06-107-32.768KHZ-T  [ABS06-107-32.768KHZ-T]  120.02,40.01 90 top

## Library data of the parts
ANT1-ANT10 = molex-antenna-2.4GHz; MPN: 0479480001
BOOT1-BOOT10 = omron_tactile_switch; MPN: B3U-3000P
C1 C15 C18 C26 C39 C42 C50 C63 C66 C74 C87 C90 C98 C111 C114 C122 C135 C138 C146 C159 C162 C170 C183 C186 C194 C207 C210 C218 C231 C234 = parts_0201; MPN: CL03A105KQ3CSNH
C2 C3 C27 C28 C51 C52 C75 C76 C99 C100 C123 C124 C147 C148 C171 C172 C195 C196 C219 C220 = microbuilder; MPN: C1005X5R0J225K050BC
C4 C5 C29 C30 C53 C54 C77 C78 C101 C102 C125 C126 C149 C150 C173 C174 C197 C198 C221 C222 = parts_0201; MPN: 02013A100JAT2A
C6 C7 C25 C31 C49 C55 C73 C79 C97 C103 C121 C127 C145 C151 C169 C175 C193 C199 C217 C223 = parts_0201; MPN: GRM033R71C271KA01D
C8 C32 C56 C80 C104 C128 C152 C176 C200 C224 = parts_0201; MPN: GRM0335C2A6R8DA01D
C9 C33 C57 C81 C105 C129 C153 C177 C201 C225 = parts_0201; MPN: GRM0335C1H2R4CA01D
C10 C11 C34 C35 C58 C59 C82 C83 C106 C107 C130 C131 C154 C155 C178 C179 C202 C203 C226 C227 = microbuilder; MPN: GRM188R61C106KAALD
C12 C13 C17 C19 C22 C36 C37 C41 C43 C46 C60 C61 C65 C67 C70 C84 C85 C89 C91 C94 C108 C109 C113 C115 C118 C132 C133 C137 C139 C142 C156 C157 C161 C163 C166 C180 C181 C185 C187 C190 C204 C205 C209 C211 C214 C228 C229 C233 C235 C238 = parts_0201; MPN: GRM033C80J104KE84D
C14 C38 C62 C86 C110 C134 C158 C182 C206 C230 = microbuilder; MPN: GRM155R60J474KE19D
C16 C40 C64 C88 C112 C136 C160 C184 C208 C232 = parts_0201; MPN: 0201YC101KAT2A
C20 C44 C68 C92 C116 C140 C164 C188 C212 C236 = parts_0201; MPN: GRM033R70J103KA01D
C21 C45 C69 C93 C117 C141 C165 C189 C213 C237 = parts_0201; MPN: GRM033R70J332KA01D
C23 C24 C47 C48 C71 C72 C95 C96 C119 C120 C143 C144 C167 C168 C191 C192 C215 C216 C239 C240 = parts_0201; MPN: GRM0335C1H4R1BA01D
FB1-FB20 = microbuilder; MPN: BLM18RK102SN1D
FID1-FID30 = adafruit
IC1-IC10 = esp32-wroom-32; MPN: ESP32-D2WD
L1-L10 = parts_0201; MPN: LQP03HQ1N6B02D
LDO1-LDO10 = MCP1700T-3302E_TT; MPN: MCP1700T-3302E/TT
PIN_EN PIN_EN1-PIN_EN9 PIN_GPIO_A PIN_GPIO_A1-PIN_GPIO_A9 PIN_GPIO_B PIN_GPIO_B1-PIN_GPIO_B9 PIN_PWR PIN_PWR1-PIN_PWR9 PIN_UART PIN_UART1-PIN_UART9 = pins_1.27mm_pitch
R1 R7 R13 R19 R25 R31 R37 R43 R49 R55 = parts_0201; MPN: RC0201JR-0720KL
R2 R8 R14 R20 R26 R32 R38 R44 R50 R56 = parts_0201; MPN: RC0201JR-0710KL
R3-R5 R9-R11 R15-R17 R21-R23 R27-R29 R33-R35 R39-R41 R45-R47 R51-R53 R57-R59 = parts_0201; MPN: RC0201FR-07270RL
R6 R12 R18 R24 R30 R36 R42 R48 R54 R60 = parts_0201
RGB1-RGB10 = osram_opto_LED; MPN: LRTB R48G
XTAL1 XTAL3 XTAL5 XTAL7 XTAL9 XTAL11 XTAL13 XTAL15 XTAL17 XTAL19 = crystals; MPN: FA-128 40.0000MF10Z-K3
XTAL2 XTAL4 XTAL6 XTAL8 XTAL10 XTAL12 XTAL14 XTAL16 XTAL18 XTAL20 = crystals; MPN: ABS06-107-32.768kHz-T

## Nets
3.3V: C1.2 C2.2 C10.2 C11.2 C12.2 C13.2 C15.2 C16.2 C17.2 C19.2 IC1.1 IC1.3 IC1.4 IC1.19 IC1.37 IC1.43 IC1.46 LDO1.VOUT PIN_GPIO_A.P$2 PIN_PWR.P$3 R2.1 RGB1.1
3.3V1: C26.2 C27.2 C34.2 C35.2 C36.2 C37.2 C39.2 C40.2 C41.2 C43.2 IC2.1 IC2.3 IC2.4 IC2.19 IC2.37 IC2.43 IC2.46 LDO2.VOUT PIN_GPIO_A1.P$2 PIN_PWR1.P$3 R8.1 RGB2.1
3.3V2: C50.2 C51.2 C58.2 C59.2 C60.2 C61.2 C63.2 C64.2 C65.2 C67.2 IC3.1 IC3.3 IC3.4 IC3.19 IC3.37 IC3.43 IC3.46 LDO3.VOUT PIN_GPIO_A2.P$2 PIN_PWR2.P$3 R14.1 RGB3.1
3.3V3: C74.2 C75.2 C82.2 C83.2 C84.2 C85.2 C87.2 C88.2 C89.2 C91.2 IC4.1 IC4.3 IC4.4 IC4.19 IC4.37 IC4.43 IC4.46 LDO4.VOUT PIN_GPIO_A3.P$2 PIN_PWR3.P$3 R20.1 RGB4.1
3.3V4: C98.2 C99.2 C106.2 C107.2 C108.2 C109.2 C111.2 C112.2 C113.2 C115.2 IC5.1 IC5.3 IC5.4 IC5.19 IC5.37 IC5.43 IC5.46 LDO5.VOUT PIN_GPIO_A4.P$2 PIN_PWR4.P$3 R26.1 RGB5.1
3.3V5: C122.2 C123.2 C130.2 C131.2 C132.2 C133.2 C135.2 C136.2 C137.2 C139.2 IC6.1 IC6.3 IC6.4 IC6.19 IC6.37 IC6.43 IC6.46 LDO6.VOUT PIN_GPIO_A5.P$2 PIN_PWR5.P$3 R32.1 RGB6.1
3.3V6: C146.2 C147.2 C154.2 C155.2 C156.2 C157.2 C159.2 C160.2 C161.2 C163.2 IC7.1 IC7.3 IC7.4 IC7.19 IC7.37 IC7.43 IC7.46 LDO7.VOUT PIN_GPIO_A6.P$2 PIN_PWR6.P$3 R38.1 RGB7.1
3.3V7: C170.2 C171.2 C178.2 C179.2 C180.2 C181.2 C183.2 C184.2 C185.2 C187.2 IC8.1 IC8.3 IC8.4 IC8.19 IC8.37 IC8.43 IC8.46 LDO8.VOUT PIN_GPIO_A7.P$2 PIN_PWR7.P$3 R44.1 RGB8.1
3.3V8: C194.2 C195.2 C202.2 C203.2 C204.2 C205.2 C207.2 C208.2 C209.2 C211.2 IC9.1 IC9.3 IC9.4 IC9.19 IC9.37 IC9.43 IC9.46 LDO9.VOUT PIN_GPIO_A8.P$2 PIN_PWR8.P$3 R50.1 RGB9.1
3.3V9: C218.2 C219.2 C226.2 C227.2 C228.2 C229.2 C231.2 C232.2 C233.2 C235.2 IC10.1 IC10.3 IC10.4 IC10.19 IC10.37 IC10.43 IC10.46 LDO10.VOUT PIN_GPIO_A9.P$2 PIN_PWR9.P$3 R56.1 RGB10.1
32K_XN: C24.1 IC1.13 XTAL2.2
32K_XN1: C48.1 IC2.13 XTAL4.2
32K_XN2: C72.1 IC3.13 XTAL6.2
32K_XN3: C96.1 IC4.13 XTAL8.2
32K_XN4: C120.1 IC5.13 XTAL10.2
32K_XN5: C144.1 IC6.13 XTAL12.2
32K_XN6: C168.1 IC7.13 XTAL14.2
32K_XN7: C192.1 IC8.13 XTAL16.2
32K_XN8: C216.1 IC9.13 XTAL18.2
32K_XN9: C240.1 IC10.13 XTAL20.2
32K_XP: C23.2 IC1.12 XTAL2.1
32K_XP1: C47.2 IC2.12 XTAL4.1
32K_XP2: C71.2 IC3.12 XTAL6.1
32K_XP3: C95.2 IC4.12 XTAL8.1
32K_XP4: C119.2 IC5.12 XTAL10.1
32K_XP5: C143.2 IC6.12 XTAL12.1
32K_XP6: C167.2 IC7.12 XTAL14.1
32K_XP7: C191.2 IC8.12 XTAL16.1
32K_XP8: C215.2 IC9.12 XTAL18.1
32K_XP9: C239.2 IC10.12 XTAL20.1
ANT: C8.2 IC1.2 L2.2
ANT1: C32.2 IC2.2 L1.2
ANT2: C56.2 IC3.2 L3.2
ANT3: C80.2 IC4.2 L4.2
ANT4: C104.2 IC5.2 L5.2
ANT5: C128.2 IC6.2 L6.2
ANT6: C152.2 IC7.2 L7.2
ANT7: C176.2 IC8.2 L8.2
ANT8: C200.2 IC9.2 L9.2
ANT9: C224.2 IC10.2 L10.2
B: IC1.34 R3.2
B1: IC2.34 R9.2
B2: IC3.34 R15.2
B3: IC4.34 R21.2
B4: IC5.34 R27.2
B5: IC6.34 R33.2
B6: IC7.34 R39.2
B7: IC8.34 R45.2
B8: IC9.34 R51.2
B9: IC10.34 R57.2
B_: R3.1 RGB1.4
B_1: R9.1 RGB2.4
B_2: R15.1 RGB3.4
B_3: R21.1 RGB4.4
B_4: R27.1 RGB5.4
B_5: R33.1 RGB6.4
B_6: R39.1 RGB7.4
B_7: R45.1 RGB8.4
B_8: R51.1 RGB9.4
B_9: R57.1 RGB10.4
BOOT: BOOT1.2 IC1.23
BOOT1: BOOT2.2 IC2.23
BOOT2: BOOT3.2 IC3.23
BOOT3: BOOT4.2 IC4.23
BOOT4: BOOT5.2 IC5.23
BOOT5: BOOT6.2 IC6.23
BOOT6: BOOT7.2 IC7.23
BOOT7: BOOT8.2 IC8.23
BOOT8: BOOT9.2 IC9.23
BOOT9: BOOT10.2 IC10.23
G: IC1.24 R4.2
G1: IC2.24 R10.2
G2: IC3.24 R16.2
G3: IC4.24 R22.2
G4: IC5.24 R28.2
G5: IC6.24 R34.2
G6: IC7.24 R40.2
G7: IC8.24 R46.2
G8: IC9.24 R52.2
G9: IC10.24 R58.2
G_: R4.1 RGB1.3
G_1: R10.1 RGB2.3
G_2: R16.1 RGB3.3
G_3: R22.1 RGB4.3
G_4: R28.1 RGB5.3
G_5: R34.1 RGB6.3
G_6: R40.1 RGB7.3
G_7: R46.1 RGB8.3
G_8: R52.1 RGB9.3
G_9: R58.1 RGB10.3
GND: BOOT1.1 C1.1 C2.1 C3.1 C4.1 C5.1 C9.1 C10.1 C11.1 C12.1 C13.1 C14.1 C15.1 C16.1 C17.1 C18.1 C19.1 C20.1 C22.1 C23.1 C24.2 FB1.2 IC1.49 L2.1 LDO1.GND PIN_GPIO_A.P$3 PIN_UART.P$1 R6.1 XTAL1.2 XTAL1.4
GND1: BOOT2.1 C26.1 C27.1 C28.1 C29.1 C30.1 C33.1 C34.1 C35.1 C36.1 C37.1 C38.1 C39.1 C40.1 C41.1 C42.1 C43.1 C44.1 C46.1 C47.1 C48.2 FB3.2 IC2.49 L1.1 LDO2.GND PIN_GPIO_A1.P$3 PIN_UART1.P$1 R12.1 XTAL3.2 XTAL3.4
GND2: BOOT3.1 C50.1 C51.1 C52.1 C53.1 C54.1 C57.1 C58.1 C59.1 C60.1 C61.1 C62.1 C63.1 C64.1 C65.1 C66.1 C67.1 C68.1 C70.1 C71.1 C72.2 FB5.2 IC3.49 L3.1 LDO3.GND PIN_GPIO_A2.P$3 PIN_UART2.P$1 R18.1 XTAL5.2 XTAL5.4
GND3: BOOT4.1 C74.1 C75.1 C76.1 C77.1 C78.1 C81.1 C82.1 C83.1 C84.1 C85.1 C86.1 C87.1 C88.1 C89.1 C90.1 C91.1 C92.1 C94.1 C95.1 C96.2 FB7.2 IC4.49 L4.1 LDO4.GND PIN_GPIO_A3.P$3 PIN_UART3.P$1 R24.1 XTAL7.2 XTAL7.4
GND4: BOOT5.1 C98.1 C99.1 C100.1 C101.1 C102.1 C105.1 C106.1 C107.1 C108.1 C109.1 C110.1 C111.1 C112.1 C113.1 C114.1 C115.1 C116.1 C118.1 C119.1 C120.2 FB9.2 IC5.49 L5.1 LDO5.GND PIN_GPIO_A4.P$3 PIN_UART4.P$1 R30.1 XTAL9.2 XTAL9.4
GND5: BOOT6.1 C122.1 C123.1 C124.1 C125.1 C126.1 C129.1 C130.1 C131.1 C132.1 C133.1 C134.1 C135.1 C136.1 C137.1 C138.1 C139.1 C140.1 C142.1 C143.1 C144.2 FB11.2 IC6.49 L6.1 LDO6.GND PIN_GPIO_A5.P$3 PIN_UART5.P$1 R36.1 XTAL11.2 XTAL11.4
GND6: BOOT7.1 C146.1 C147.1 C148.1 C149.1 C150.1 C153.1 C154.1 C155.1 C156.1 C157.1 C158.1 C159.1 C160.1 C161.1 C162.1 C163.1 C164.1 C166.1 C167.1 C168.2 FB13.2 IC7.49 L7.1 LDO7.GND PIN_GPIO_A6.P$3 PIN_UART6.P$1 R42.1 XTAL13.2 XTAL13.4
GND7: BOOT8.1 C170.1 C171.1 C172.1 C173.1 C174.1 C177.1 C178.1 C179.1 C180.1 C181.1 C182.1 C183.1 C184.1 C185.1 C186.1 C187.1 C188.1 C190.1 C191.1 C192.2 FB15.2 IC8.49 L8.1 LDO8.GND PIN_GPIO_A7.P$3 PIN_UART7.P$1 R48.1 XTAL15.2 XTAL15.4
GND8: BOOT9.1 C194.1 C195.1 C196.1 C197.1 C198.1 C201.1 C202.1 C203.1 C204.1 C205.1 C206.1 C207.1 C208.1 C209.1 C210.1 C211.1 C212.1 C214.1 C215.1 C216.2 FB17.2 IC9.49 L9.1 LDO9.GND PIN_GPIO_A8.P$3 PIN_UART8.P$1 R54.1 XTAL17.2 XTAL17.4
GND9: BOOT10.1 C218.1 C219.1 C220.1 C221.1 C222.1 C225.1 C226.1 C227.1 C228.1 C229.1 C230.1 C231.1 C232.1 C233.1 C234.1 C235.1 C236.1 C238.1 C239.1 C240.2 FB19.2 IC10.49 L10.1 LDO10.GND PIN_GPIO_A9.P$3 PIN_UART9.P$1 R60.1 XTAL19.2 XTAL19.4
GND_PIN: FB1.1 PIN_PWR.P$1
GND_PIN1: FB3.1 PIN_PWR1.P$1
GND_PIN2: FB5.1 PIN_PWR2.P$1
GND_PIN3: FB7.1 PIN_PWR3.P$1
GND_PIN4: FB9.1 PIN_PWR4.P$1
GND_PIN5: FB11.1 PIN_PWR5.P$1
GND_PIN6: FB13.1 PIN_PWR6.P$1
GND_PIN7: FB15.1 PIN_PWR7.P$1
GND_PIN8: FB17.1 PIN_PWR8.P$1
GND_PIN9: FB19.1 PIN_PWR9.P$1
IO1: IC2.10 PIN_EN1.P$2
IO2: IC2.11 PIN_EN1.P$1
IO3: IC2.14
IO4: IC2.16
IO5: IC3.10 PIN_EN2.P$2
IO6: IC3.11 PIN_EN2.P$1
IO7: IC3.14
IO8: IC3.16
IO9: IC4.10 PIN_EN3.P$2
IO10: IC4.11 PIN_EN3.P$1
IO11: IC4.14
IO12: IC4.16
IO13: IC5.10 PIN_EN4.P$2
IO14: IC5.11 PIN_EN4.P$1
IO15: IC5.14
IO16: IC5.16
IO17: IC6.10 PIN_EN5.P$2
IO18: IC6.11 PIN_EN5.P$1
IO19: IC6.14
IO20: IC6.16
IO21: IC7.10 PIN_EN6.P$2
IO22: IC7.11 PIN_EN6.P$1
IO23: IC7.14
IO24: IC7.16
IO25: IC1.14
IO26: IC8.10 PIN_EN7.P$2
IO27: IC1.16
IO28: IC8.11 PIN_EN7.P$1
IO29: IC8.14
IO30: IC8.16
IO31: IC9.10 PIN_EN8.P$2
IO32: IC9.11 PIN_EN8.P$1
IO33: IC9.14
IO34: IC1.10 PIN_EN.P$2
IO35: IC1.11 PIN_EN.P$1
IO36: IC9.16
IO37: IC10.10 PIN_EN9.P$2
IO38: IC10.11 PIN_EN9.P$1
IO39: IC10.14
IO40: IC10.16
MTCK: IC1.20 PIN_GPIO_A.P$1
MTCK1: IC2.20 PIN_GPIO_A1.P$1
MTCK2: IC3.20 PIN_GPIO_A2.P$1
MTCK3: IC4.20 PIN_GPIO_A3.P$1
MTCK4: IC5.20 PIN_GPIO_A4.P$1
MTCK5: IC6.20 PIN_GPIO_A5.P$1
MTCK6: IC7.20 PIN_GPIO_A6.P$1
MTCK7: IC8.20 PIN_GPIO_A7.P$1
MTCK8: IC9.20 PIN_GPIO_A8.P$1
MTCK9: IC10.20 PIN_GPIO_A9.P$1
MTDI: IC1.18 PIN_GPIO_B.P$3
MTDI1: IC2.18 PIN_GPIO_B1.P$3
MTDI2: IC3.18 PIN_GPIO_B2.P$3
MTDI3: IC4.18 PIN_GPIO_B3.P$3
MTDI4: IC5.18 PIN_GPIO_B4.P$3
MTDI5: IC6.18 PIN_GPIO_B5.P$3
MTDI6: IC7.18 PIN_GPIO_B6.P$3
MTDI7: IC8.18 PIN_GPIO_B7.P$3
MTDI8: IC9.18 PIN_GPIO_B8.P$3
MTDI9: IC10.18 PIN_GPIO_B9.P$3
MTDO: IC1.21 PIN_GPIO_B.P$2
MTDO1: IC2.21 PIN_GPIO_B1.P$2
MTDO2: IC3.21 PIN_GPIO_B2.P$2
MTDO3: IC4.21 PIN_GPIO_B3.P$2
MTDO4: IC5.21 PIN_GPIO_B4.P$2
MTDO5: IC6.21 PIN_GPIO_B5.P$2
MTDO6: IC7.21 PIN_GPIO_B6.P$2
MTDO7: IC8.21 PIN_GPIO_B7.P$2
MTDO8: IC9.21 PIN_GPIO_B8.P$2
MTDO9: IC10.21 PIN_GPIO_B9.P$2
MTMS: IC1.17 PIN_GPIO_B.P$1
MTMS1: IC2.17 PIN_GPIO_B1.P$1
MTMS2: IC3.17 PIN_GPIO_B2.P$1
MTMS3: IC4.17 PIN_GPIO_B3.P$1
MTMS4: IC5.17 PIN_GPIO_B4.P$1
MTMS5: IC6.17 PIN_GPIO_B5.P$1
MTMS6: IC7.17 PIN_GPIO_B6.P$1
MTMS7: IC8.17 PIN_GPIO_B7.P$1
MTMS8: IC9.17 PIN_GPIO_B8.P$1
MTMS9: IC10.17 PIN_GPIO_B9.P$1
N$1: C6.1 IC1.5
N$2: C6.2 IC1.6
N$3: C7.2 IC1.8
N$4: C7.1 IC1.7
N$5: C25.2 IC2.6
N$6: ANT1.ANT C8.1 C9.2 R6.2
N$7: C21.2 IC1.47 R1.1
N$9: C20.2 C21.1 IC1.48 R1.2
N$10: C31.2 IC2.8
N$12: C31.1 IC2.7
N$13: ANT2.ANT C32.1 C33.2 R12.2
N$14: C25.1 IC2.5
N$15: C45.2 IC2.47 R7.1
N$16: C44.2 C45.1 IC2.48 R7.2
N$19: C49.2 IC3.6
N$20: C55.2 IC3.8
N$21: C55.1 IC3.7
N$22: ANT3.ANT C56.1 C57.2 R18.2
N$23: C49.1 IC3.5
N$24: C69.2 IC3.47 R13.1
N$25: C68.2 C69.1 IC3.48 R13.2
N$28: C73.2 IC4.6
N$29: C79.2 IC4.8
N$30: C79.1 IC4.7
N$31: ANT4.ANT C80.1 C81.2 R24.2
N$32: C73.1 IC4.5
N$33: C93.2 IC4.47 R19.1
N$34: C92.2 C93.1 IC4.48 R19.2
N$37: C97.2 IC5.6
N$38: C103.2 IC5.8
N$39: C103.1 IC5.7
N$40: ANT5.ANT C104.1 C105.2 R30.2
N$41: C97.1 IC5.5
N$42: C117.2 IC5.47 R25.1
N$43: C116.2 C117.1 IC5.48 R25.2
N$46: C121.2 IC6.6
N$47: C127.2 IC6.8
N$48: C127.1 IC6.7
N$49: ANT6.ANT C128.1 C129.2 R36.2
N$50: C121.1 IC6.5
N$51: C141.2 IC6.47 R31.1
N$52: C140.2 C141.1 IC6.48 R31.2
N$55: C145.2 IC7.6
N$56: C151.2 IC7.8
N$57: C151.1 IC7.7
N$58: ANT7.ANT C152.1 C153.2 R42.2
N$59: C145.1 IC7.5
N$60: C165.2 IC7.47 R37.1
N$61: C164.2 C165.1 IC7.48 R37.2
N$64: C169.2 IC8.6
N$65: C175.2 IC8.8
N$66: C175.1 IC8.7
N$67: ANT8.ANT C176.1 C177.2 R48.2
N$68: C169.1 IC8.5
N$69: C189.2 IC8.47 R43.1
N$70: C188.2 C189.1 IC8.48 R43.2
N$73: C193.2 IC9.6
N$74: C199.2 IC9.8
N$75: C199.1 IC9.7
N$76: ANT9.ANT C200.1 C201.2 R54.2
N$77: C193.1 IC9.5
N$78: C213.2 IC9.47 R49.1
N$79: C212.2 C213.1 IC9.48 R49.2
N$82: C217.2 IC10.6
N$83: C223.2 IC10.8
N$84: C223.1 IC10.7
N$85: ANT10.ANT C224.1 C225.2 R60.2
N$86: C217.1 IC10.5
N$87: C237.2 IC10.47 R55.1
N$88: C236.2 C237.1 IC10.48 R55.2
R: IC1.15 R5.2
R1: IC2.15 R11.2
R2: IC3.15 R17.2
R3: IC4.15 R23.2
R4: IC5.15 R29.2
R5: IC6.15 R35.2
R6: IC7.15 R41.2
R7: IC8.15 R47.2
R8: IC9.15 R53.2
R9: IC10.15 R59.2
R_: R5.1 RGB1.2
R_1: R11.1 RGB2.2
R_2: R17.1 RGB3.2
R_3: R23.1 RGB4.2
R_4: R29.1 RGB5.2
R_5: R35.1 RGB6.2
R_6: R41.1 RGB7.2
R_7: R47.1 RGB8.2
R_8: R53.1 RGB9.2
R_9: R59.1 RGB10.2
RESET: C22.2 IC1.9 PIN_EN.P$3 R2.2
RESET1: C46.2 IC2.9 PIN_EN1.P$3 R8.2
RESET2: C70.2 IC3.9 PIN_EN2.P$3 R14.2
RESET3: C94.2 IC4.9 PIN_EN3.P$3 R20.2
RESET4: C118.2 IC5.9 PIN_EN4.P$3 R26.2
RESET5: C142.2 IC6.9 PIN_EN5.P$3 R32.2
RESET6: C166.2 IC7.9 PIN_EN6.P$3 R38.2
RESET7: C190.2 IC8.9 PIN_EN7.P$3 R44.2
RESET8: C214.2 IC9.9 PIN_EN8.P$3 R50.2
RESET9: C238.2 IC10.9 PIN_EN9.P$3 R56.2
RXD: IC1.40 PIN_UART.P$2
RXD1: IC2.40 PIN_UART1.P$2
RXD2: IC3.40 PIN_UART2.P$2
RXD3: IC4.40 PIN_UART3.P$2
RXD4: IC5.40 PIN_UART4.P$2
RXD5: IC6.40 PIN_UART5.P$2
RXD6: IC7.40 PIN_UART6.P$2
RXD7: IC8.40 PIN_UART7.P$2
RXD8: IC9.40 PIN_UART8.P$2
RXD9: IC10.40 PIN_UART9.P$2
TXD: IC1.41 PIN_UART.P$3
TXD1: IC2.41 PIN_UART1.P$3
TXD2: IC3.41 PIN_UART2.P$3
TXD3: IC4.41 PIN_UART3.P$3
TXD4: IC5.41 PIN_UART4.P$3
TXD5: IC6.41 PIN_UART5.P$3
TXD6: IC7.41 PIN_UART6.P$3
TXD7: IC8.41 PIN_UART7.P$3
TXD8: IC9.41 PIN_UART8.P$3
TXD9: IC10.41 PIN_UART9.P$3
VDD_SDIO: C18.2 IC1.26
VDD_SDIO1: C42.2 IC2.26
VDD_SDIO2: C66.2 IC3.26
VDD_SDIO3: C90.2 IC4.26
VDD_SDIO4: C114.2 IC5.26
VDD_SDIO5: C138.2 IC6.26
VDD_SDIO6: C162.2 IC7.26
VDD_SDIO7: C186.2 IC8.26
VDD_SDIO8: C210.2 IC9.26
VDD_SDIO9: C234.2 IC10.26
VIN: C3.2 C14.2 FB2.1 LDO1.VIN
VIN1: C28.2 C38.2 FB4.1 LDO2.VIN
VIN2: C52.2 C62.2 FB6.1 LDO3.VIN
VIN3: C76.2 C86.2 FB8.1 LDO4.VIN
VIN4: C100.2 C110.2 FB10.1 LDO5.VIN
VIN5: C124.2 C134.2 FB12.1 LDO6.VIN
VIN6: C148.2 C158.2 FB14.1 LDO7.VIN
VIN7: C172.2 C182.2 FB16.1 LDO8.VIN
VIN8: C196.2 C206.2 FB18.1 LDO9.VIN
VIN9: C220.2 C230.2 FB20.1 LDO10.VIN
VIN_PIN: FB2.2 PIN_PWR.P$2
VIN_PIN1: FB4.2 PIN_PWR1.P$2
VIN_PIN2: FB6.2 PIN_PWR2.P$2
VIN_PIN3: FB8.2 PIN_PWR3.P$2
VIN_PIN4: FB10.2 PIN_PWR4.P$2
VIN_PIN5: FB12.2 PIN_PWR5.P$2
VIN_PIN6: FB14.2 PIN_PWR6.P$2
VIN_PIN7: FB16.2 PIN_PWR7.P$2
VIN_PIN8: FB18.2 PIN_PWR8.P$2
VIN_PIN9: FB20.2 PIN_PWR9.P$2
XIN: C4.2 IC1.45 XTAL1.1
XIN1: C29.2 IC2.45 XTAL3.1
XIN2: C53.2 IC3.45 XTAL5.1
XIN3: C77.2 IC4.45 XTAL7.1
XIN4: C101.2 IC5.45 XTAL9.1
XIN5: C125.2 IC6.45 XTAL11.1
XIN6: C149.2 IC7.45 XTAL13.1
XIN7: C173.2 IC8.45 XTAL15.1
XIN8: C197.2 IC9.45 XTAL17.1
XIN9: C221.2 IC10.45 XTAL19.1
XOUT: C5.2 IC1.44 XTAL1.3
XOUT1: C30.2 IC2.44 XTAL3.3
XOUT2: C54.2 IC3.44 XTAL5.3
XOUT3: C78.2 IC4.44 XTAL7.3
XOUT4: C102.2 IC5.44 XTAL9.3
XOUT5: C126.2 IC6.44 XTAL11.3
XOUT6: C150.2 IC7.44 XTAL13.3
XOUT7: C174.2 IC8.44 XTAL15.3
XOUT8: C198.2 IC9.44 XTAL17.3
XOUT9: C222.2 IC10.44 XTAL19.3

## Tracks (layer width: path | path; a pad name or v marks a point on that pad's centre or on a via)
3.3V  (via drill 0.25 pad 0.51)
  Top 0.152: IC1.3 11.11,10.62 v11.31,10.41 | C17.2 v11.3,10.4 v11.31,10.41 | v11.31,10.41 11.46,10.56 IC1.4
  Top 0.178: IC1.19 16,13.52 v16.26,13.27 C19.2 | IC1.46 8.7,12.82 v8.38,12.51 | IC1.43 8.71,13.87 C15.2 | IC1.37 10.76,16.55 10.67,16.64 v9.78,16.64 | C10.2 9.41,10.49 9.91,10.49 10.41,10.99 IC1.1
  Top 0.254: LDO1.VOUT 12.19,18.05 C2.2 | C13.2 C12.2 8.67,8.19 C1.2 8.41,8.48 C11.2 C10.2 v9.27,10.41 | C15.2 C16.2 8.55,15.33 v8.38,15.49 | LDO1.VOUT v13.14,17.02 | LDO1.VOUT 16.24,18.05 16.51,17.78 18.92,17.78 PIN_PWR.P$3 | R2.1 16.1,8.48 v16.13,8.51 | v17.48,16.56 RGB1.1
  Route15 0.381: 14.61,10.41 15.75,10.41 16.13,10.03 v16.13,8.51 | 14.61,10.41 v11.31,10.41 | v16.26,13.27 14.42,13.27 | 14.42,13.27 13.14,14.54 v13.14,17.02 12.76,16.64 v9.78,16.64 9.46,16.64 8.38,15.56 v8.38,15.49 7.94,15.05 7.94,12.95 v8.38,12.51 8.38,11.3 v9.27,10.41 8.64,9.78 8.64,8.13 7.5,8.13 PIN_GPIO_A.P$2 | 14.42,13.27 14.61,13.08 14.61,10.41 | v17.48,16.56 17.48,17.1 17.78,17.4 18.58,17.4 PIN_PWR.P$3
3.3V1  (via drill 0.25 pad 0.51)
  Top 0.152: IC2.3 11.11,39.83 v11.31,39.62 | C41.2 v11.3,39.61 v11.31,39.62 | v11.31,39.62 11.46,39.77 IC2.4
  Top 0.178: IC2.19 16,42.73 v16.26,42.48 C43.2 | IC2.46 8.7,42.03 v8.38,41.72 | IC2.43 8.71,43.08 C39.2 | IC2.37 10.76,45.76 10.67,45.85 v9.78,45.85 | C34.2 9.41,39.7 9.91,39.7 10.41,40.2 IC2.1
  Top 0.254: LDO2.VOUT 12.19,47.26 C27.2 | C37.2 C36.2 8.67,37.4 C26.2 8.41,37.69 C35.2 C34.2 v9.27,39.62 | C39.2 C40.2 8.55,44.54 v8.38,44.7 | LDO2.VOUT v13.14,46.23 | LDO2.VOUT 16.24,47.26 16.51,46.99 18.92,46.99 PIN_PWR1.P$3 | R8.1 16.1,37.69 v16.13,37.72 | v17.48,45.77 RGB2.1
  Route15 0.381: 14.61,39.62 15.75,39.62 16.13,39.24 v16.13,37.72 | 14.61,39.62 v11.31,39.62 | v16.26,42.48 14.42,42.48 | 14.42,42.48 13.14,43.75 v13.14,46.23 12.76,45.85 v9.78,45.85 9.46,45.85 8.38,44.77 v8.38,44.7 7.94,44.26 7.94,42.16 v8.38,41.72 8.38,40.51 v9.27,39.62 8.64,38.99 8.64,37.34 7.5,37.34 PIN_GPIO_A1.P$2 | 14.42,42.48 14.61,42.29 14.61,39.62 | v17.48,45.77 17.48,46.31 17.78,46.61 18.58,46.61 PIN_PWR1.P$3
3.3V2  (via drill 0.25 pad 0.51)
  Top 0.152: IC3.3 36.51,10.62 v36.71,10.41 | C65.2 v36.7,10.4 v36.71,10.41 | v36.71,10.41 36.86,10.56 IC3.4
  Top 0.178: IC3.19 41.4,13.52 v41.66,13.27 C67.2 | IC3.46 34.1,12.82 v33.78,12.51 | IC3.43 34.11,13.87 C63.2 | IC3.37 36.16,16.55 36.07,16.64 v35.18,16.64 | C58.2 34.81,10.49 35.31,10.49 35.81,10.99 IC3.1
  Top 0.254: LDO3.VOUT 37.59,18.05 C51.2 | C61.2 C60.2 34.07,8.19 C50.2 33.81,8.48 C59.2 C58.2 v34.67,10.41 | C63.2 C64.2 33.95,15.33 v33.78,15.49 | LDO3.VOUT v38.54,17.02 | LDO3.VOUT 41.64,18.05 41.91,17.78 44.32,17.78 PIN_PWR2.P$3 | R14.1 41.5,8.48 v41.53,8.51 | v42.88,16.56 RGB3.1
  Route15 0.381: 40.01,10.41 41.15,10.41 41.53,10.03 v41.53,8.51 | 40.01,10.41 v36.71,10.41 | v41.66,13.27 39.82,13.27 | 39.82,13.27 38.54,14.54 v38.54,17.02 38.16,16.64 v35.18,16.64 34.86,16.64 33.78,15.56 v33.78,15.49 33.34,15.05 33.34,12.95 v33.78,12.51 33.78,11.3 v34.67,10.41 34.04,9.78 34.04,8.13 32.9,8.13 PIN_GPIO_A2.P$2 | 39.82,13.27 40.01,13.08 40.01,10.41 | v42.88,16.56 42.88,17.1 43.18,17.4 43.98,17.4 PIN_PWR2.P$3
3.3V3  (via drill 0.25 pad 0.51)
  Top 0.152: IC4.3 36.51,39.83 v36.71,39.62 | C89.2 v36.7,39.61 v36.71,39.62 | v36.71,39.62 36.86,39.77 IC4.4
  Top 0.178: IC4.19 41.4,42.73 v41.66,42.48 C91.2 | IC4.46 34.1,42.03 v33.78,41.72 | IC4.43 34.11,43.08 C87.2 | IC4.37 36.16,45.76 36.07,45.85 v35.18,45.85 | C82.2 34.81,39.7 35.31,39.7 35.81,40.2 IC4.1
  Top 0.254: LDO4.VOUT 37.59,47.26 C75.2 | C85.2 C84.2 34.07,37.4 C74.2 33.81,37.69 C83.2 C82.2 v34.67,39.62 | C87.2 C88.2 33.95,44.54 v33.78,44.7 | LDO4.VOUT v38.54,46.23 | LDO4.VOUT 41.64,47.26 41.91,46.99 44.32,46.99 PIN_PWR3.P$3 | R20.1 41.5,37.69 v41.53,37.72 | v42.88,45.77 RGB4.1
  Route15 0.381: 40.01,39.62 41.15,39.62 41.53,39.24 v41.53,37.72 | 40.01,39.62 v36.71,39.62 | v41.66,42.48 39.82,42.48 | 39.82,42.48 38.54,43.75 v38.54,46.23 38.16,45.85 v35.18,45.85 34.86,45.85 33.78,44.77 v33.78,44.7 33.34,44.26 33.34,42.16 v33.78,41.72 33.78,40.51 v34.67,39.62 34.04,38.99 34.04,37.34 32.9,37.34 PIN_GPIO_A3.P$2 | 39.82,42.48 40.01,42.29 40.01,39.62 | v42.88,45.77 42.88,46.31 43.18,46.61 43.98,46.61 PIN_PWR3.P$3
3.3V4  (via drill 0.25 pad 0.51)
  Top 0.152: IC5.3 61.91,10.62 v62.11,10.41 | C113.2 v62.1,10.4 v62.11,10.41 | v62.11,10.41 62.26,10.56 IC5.4
  Top 0.178: IC5.19 66.8,13.52 v67.06,13.27 C115.2 | IC5.46 59.5,12.82 v59.18,12.51 | IC5.43 59.51,13.87 C111.2 | IC5.37 61.56,16.55 61.47,16.64 v60.58,16.64 | C106.2 60.21,10.49 60.71,10.49 61.21,10.99 IC5.1
  Top 0.254: LDO5.VOUT 62.98,18.05 C99.2 | C109.2 C108.2 59.47,8.19 C98.2 59.22,8.48 C107.2 C106.2 v60.07,10.41 | C111.2 C112.2 59.35,15.33 v59.18,15.49 | LDO5.VOUT v63.94,17.02 | LDO5.VOUT 67.04,18.05 67.31,17.78 69.72,17.78 PIN_PWR4.P$3 | R26.1 66.9,8.48 v66.93,8.51 | v68.28,16.56 RGB5.1
  Route15 0.381: 65.41,10.41 66.55,10.41 66.93,10.03 v66.93,8.51 | 65.41,10.41 v62.11,10.41 | v67.06,13.27 65.22,13.27 | 65.22,13.27 63.94,14.54 v63.94,17.02 63.56,16.64 v60.58,16.64 60.26,16.64 59.18,15.56 v59.18,15.49 58.74,15.05 58.74,12.95 v59.18,12.51 59.18,11.3 v60.07,10.41 59.44,9.78 59.44,8.13 58.3,8.13 PIN_GPIO_A4.P$2 | 65.22,13.27 65.41,13.08 65.41,10.41 | v68.28,16.56 68.28,17.1 68.58,17.4 69.38,17.4 PIN_PWR4.P$3
3.3V5  (via drill 0.25 pad 0.51)
  Top 0.152: IC6.3 61.91,39.83 v62.11,39.62 | C137.2 v62.1,39.61 v62.11,39.62 | v62.11,39.62 62.26,39.77 IC6.4
  Top 0.178: IC6.19 66.8,42.73 v67.06,42.48 C139.2 | IC6.46 59.5,42.03 v59.18,41.72 | IC6.43 59.51,43.08 C135.2 | IC6.37 61.56,45.76 61.47,45.85 v60.58,45.85 | C130.2 60.21,39.7 60.71,39.7 61.21,40.2 IC6.1
  Top 0.254: LDO6.VOUT 62.98,47.26 C123.2 | C133.2 C132.2 59.47,37.4 C122.2 59.22,37.69 C131.2 C130.2 v60.07,39.62 | C135.2 C136.2 59.35,44.54 v59.18,44.7 | LDO6.VOUT v63.94,46.23 | LDO6.VOUT 67.04,47.26 67.31,46.99 69.72,46.99 PIN_PWR5.P$3 | R32.1 66.9,37.69 v66.93,37.72 | v68.28,45.77 RGB6.1
  Route15 0.381: 65.41,39.62 66.55,39.62 66.93,39.24 v66.93,37.72 | 65.41,39.62 v62.11,39.62 | v67.06,42.48 65.22,42.48 | 65.22,42.48 63.94,43.75 v63.94,46.23 63.56,45.85 v60.58,45.85 60.26,45.85 59.18,44.77 v59.18,44.7 58.74,44.26 58.74,42.16 v59.18,41.72 59.18,40.51 v60.07,39.62 59.44,38.99 59.44,37.34 58.3,37.34 PIN_GPIO_A5.P$2 | 65.22,42.48 65.41,42.29 65.41,39.62 | v68.28,45.77 68.28,46.31 68.58,46.61 69.38,46.61 PIN_PWR5.P$3
3.3V6  (via drill 0.25 pad 0.51)
  Top 0.152: IC7.3 87.31,10.62 v87.51,10.41 | C161.2 v87.5,10.4 v87.51,10.41 | v87.51,10.41 87.66,10.56 IC7.4
  Top 0.178: IC7.19 92.2,13.52 v92.46,13.27 C163.2 | IC7.46 84.9,12.82 v84.58,12.51 | IC7.43 84.91,13.87 C159.2 | IC7.37 86.96,16.55 86.87,16.64 v85.98,16.64 | C154.2 85.61,10.49 86.11,10.49 86.61,10.99 IC7.1
  Top 0.254: LDO7.VOUT 88.39,18.05 C147.2 | C157.2 C156.2 84.87,8.19 C146.2 84.61,8.48 C155.2 C154.2 v85.47,10.41 | C159.2 C160.2 84.75,15.33 v84.58,15.49 | LDO7.VOUT v89.34,17.02 | LDO7.VOUT 92.44,18.05 92.71,17.78 95.12,17.78 PIN_PWR6.P$3 | R38.1 92.3,8.48 v92.33,8.51 | v93.68,16.56 RGB7.1
  Route15 0.381: 90.81,10.41 91.95,10.41 92.33,10.03 v92.33,8.51 | 90.81,10.41 v87.51,10.41 | v92.46,13.27 90.62,13.27 | 90.62,13.27 89.34,14.54 v89.34,17.02 88.96,16.64 v85.98,16.64 85.66,16.64 84.58,15.56 v84.58,15.49 84.14,15.05 84.14,12.95 v84.58,12.51 84.58,11.3 v85.47,10.41 84.84,9.78 84.84,8.13 83.7,8.13 PIN_GPIO_A6.P$2 | 90.62,13.27 90.81,13.08 90.81,10.41 | v93.68,16.56 93.68,17.1 93.98,17.4 94.78,17.4 PIN_PWR6.P$3
3.3V7  (via drill 0.25 pad 0.51)
  Top 0.152: IC8.3 87.31,39.83 v87.51,39.62 | C185.2 v87.5,39.61 v87.51,39.62 | v87.51,39.62 87.66,39.77 IC8.4
  Top 0.178: IC8.19 92.2,42.73 v92.46,42.48 C187.2 | IC8.46 84.9,42.03 v84.58,41.72 | IC8.43 84.91,43.08 C183.2 | IC8.37 86.96,45.76 86.87,45.85 v85.98,45.85 | C178.2 85.61,39.7 86.11,39.7 86.61,40.2 IC8.1